# Altium PCB 0.PCB1.PcbDoc (part 1 of 8)
Units mil, origin at the board's own origin, x right, y up, seen from the top; angles counter-clockwise.
Board outline 3897.64 x 3897.64 mil, 6 copper layers (Top Layer, Layer 1, Layer 3, Layer 4, Layer 2, Bottom Layer), stack 60.567 mil thick; 715 components, 563 nets, 2530 pads, 1442 vias.
Unrouted connection lines stored in the file: 6.
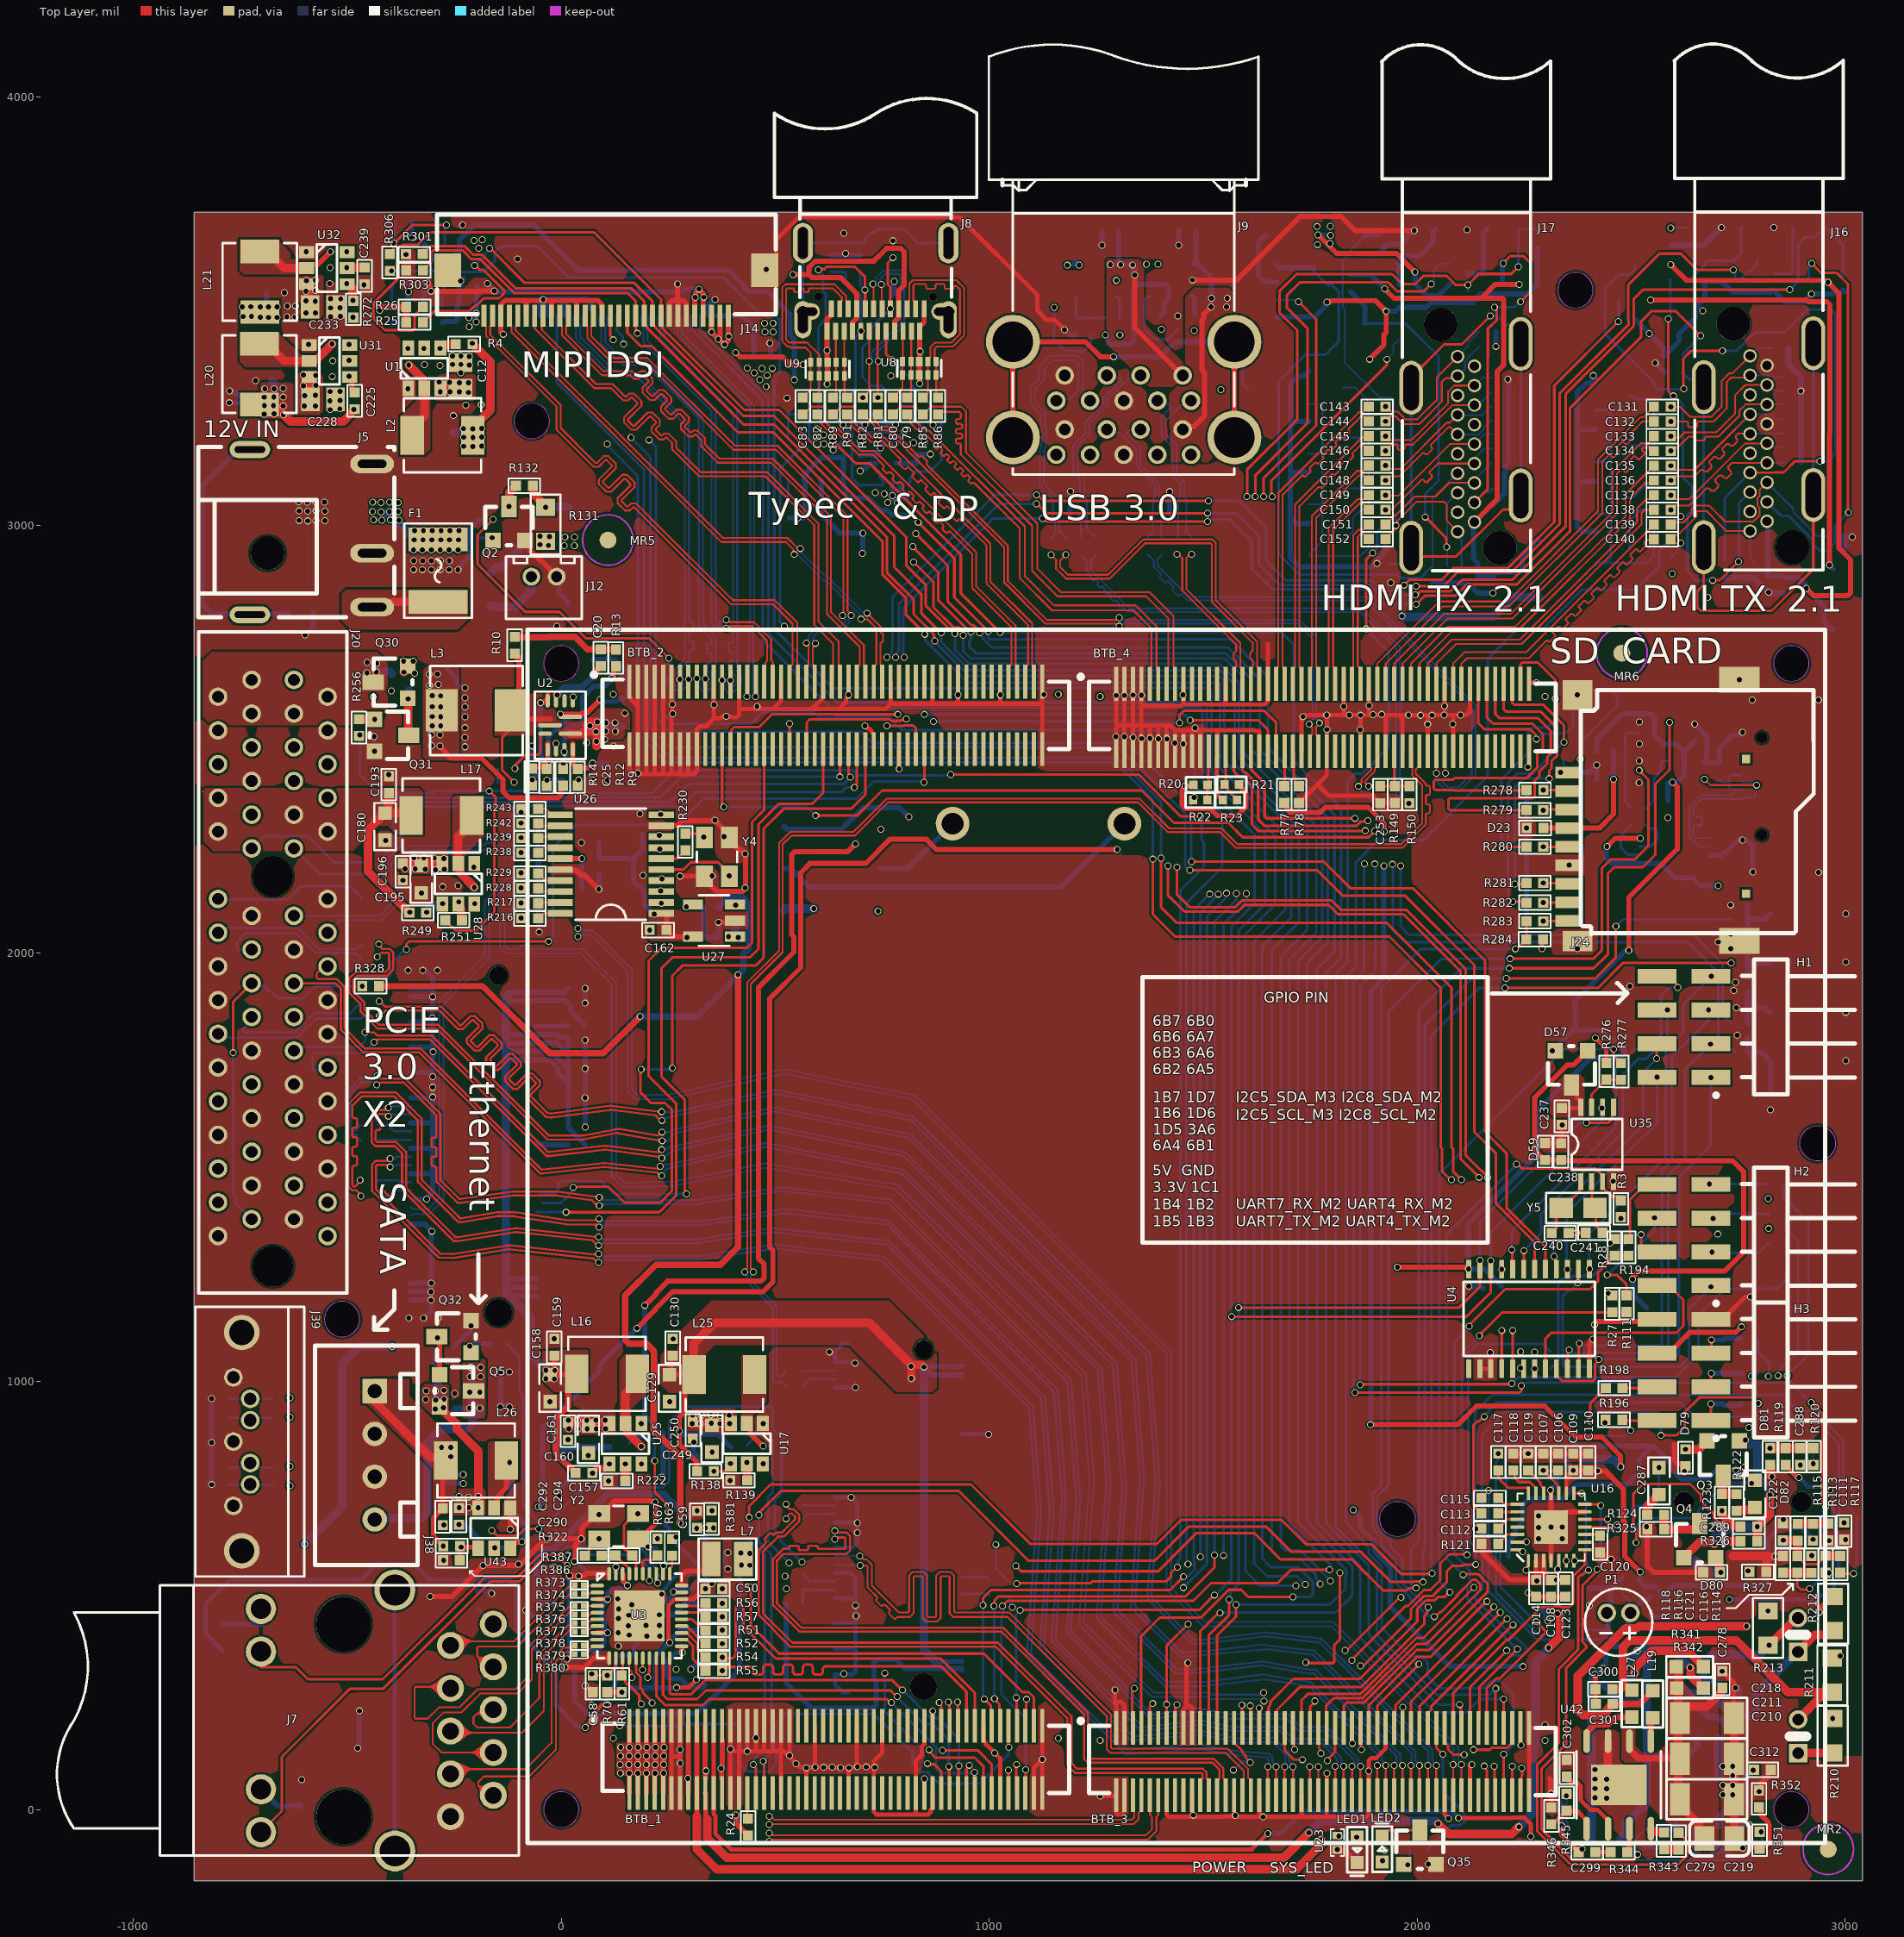
[diagram p0: Top Layer view]
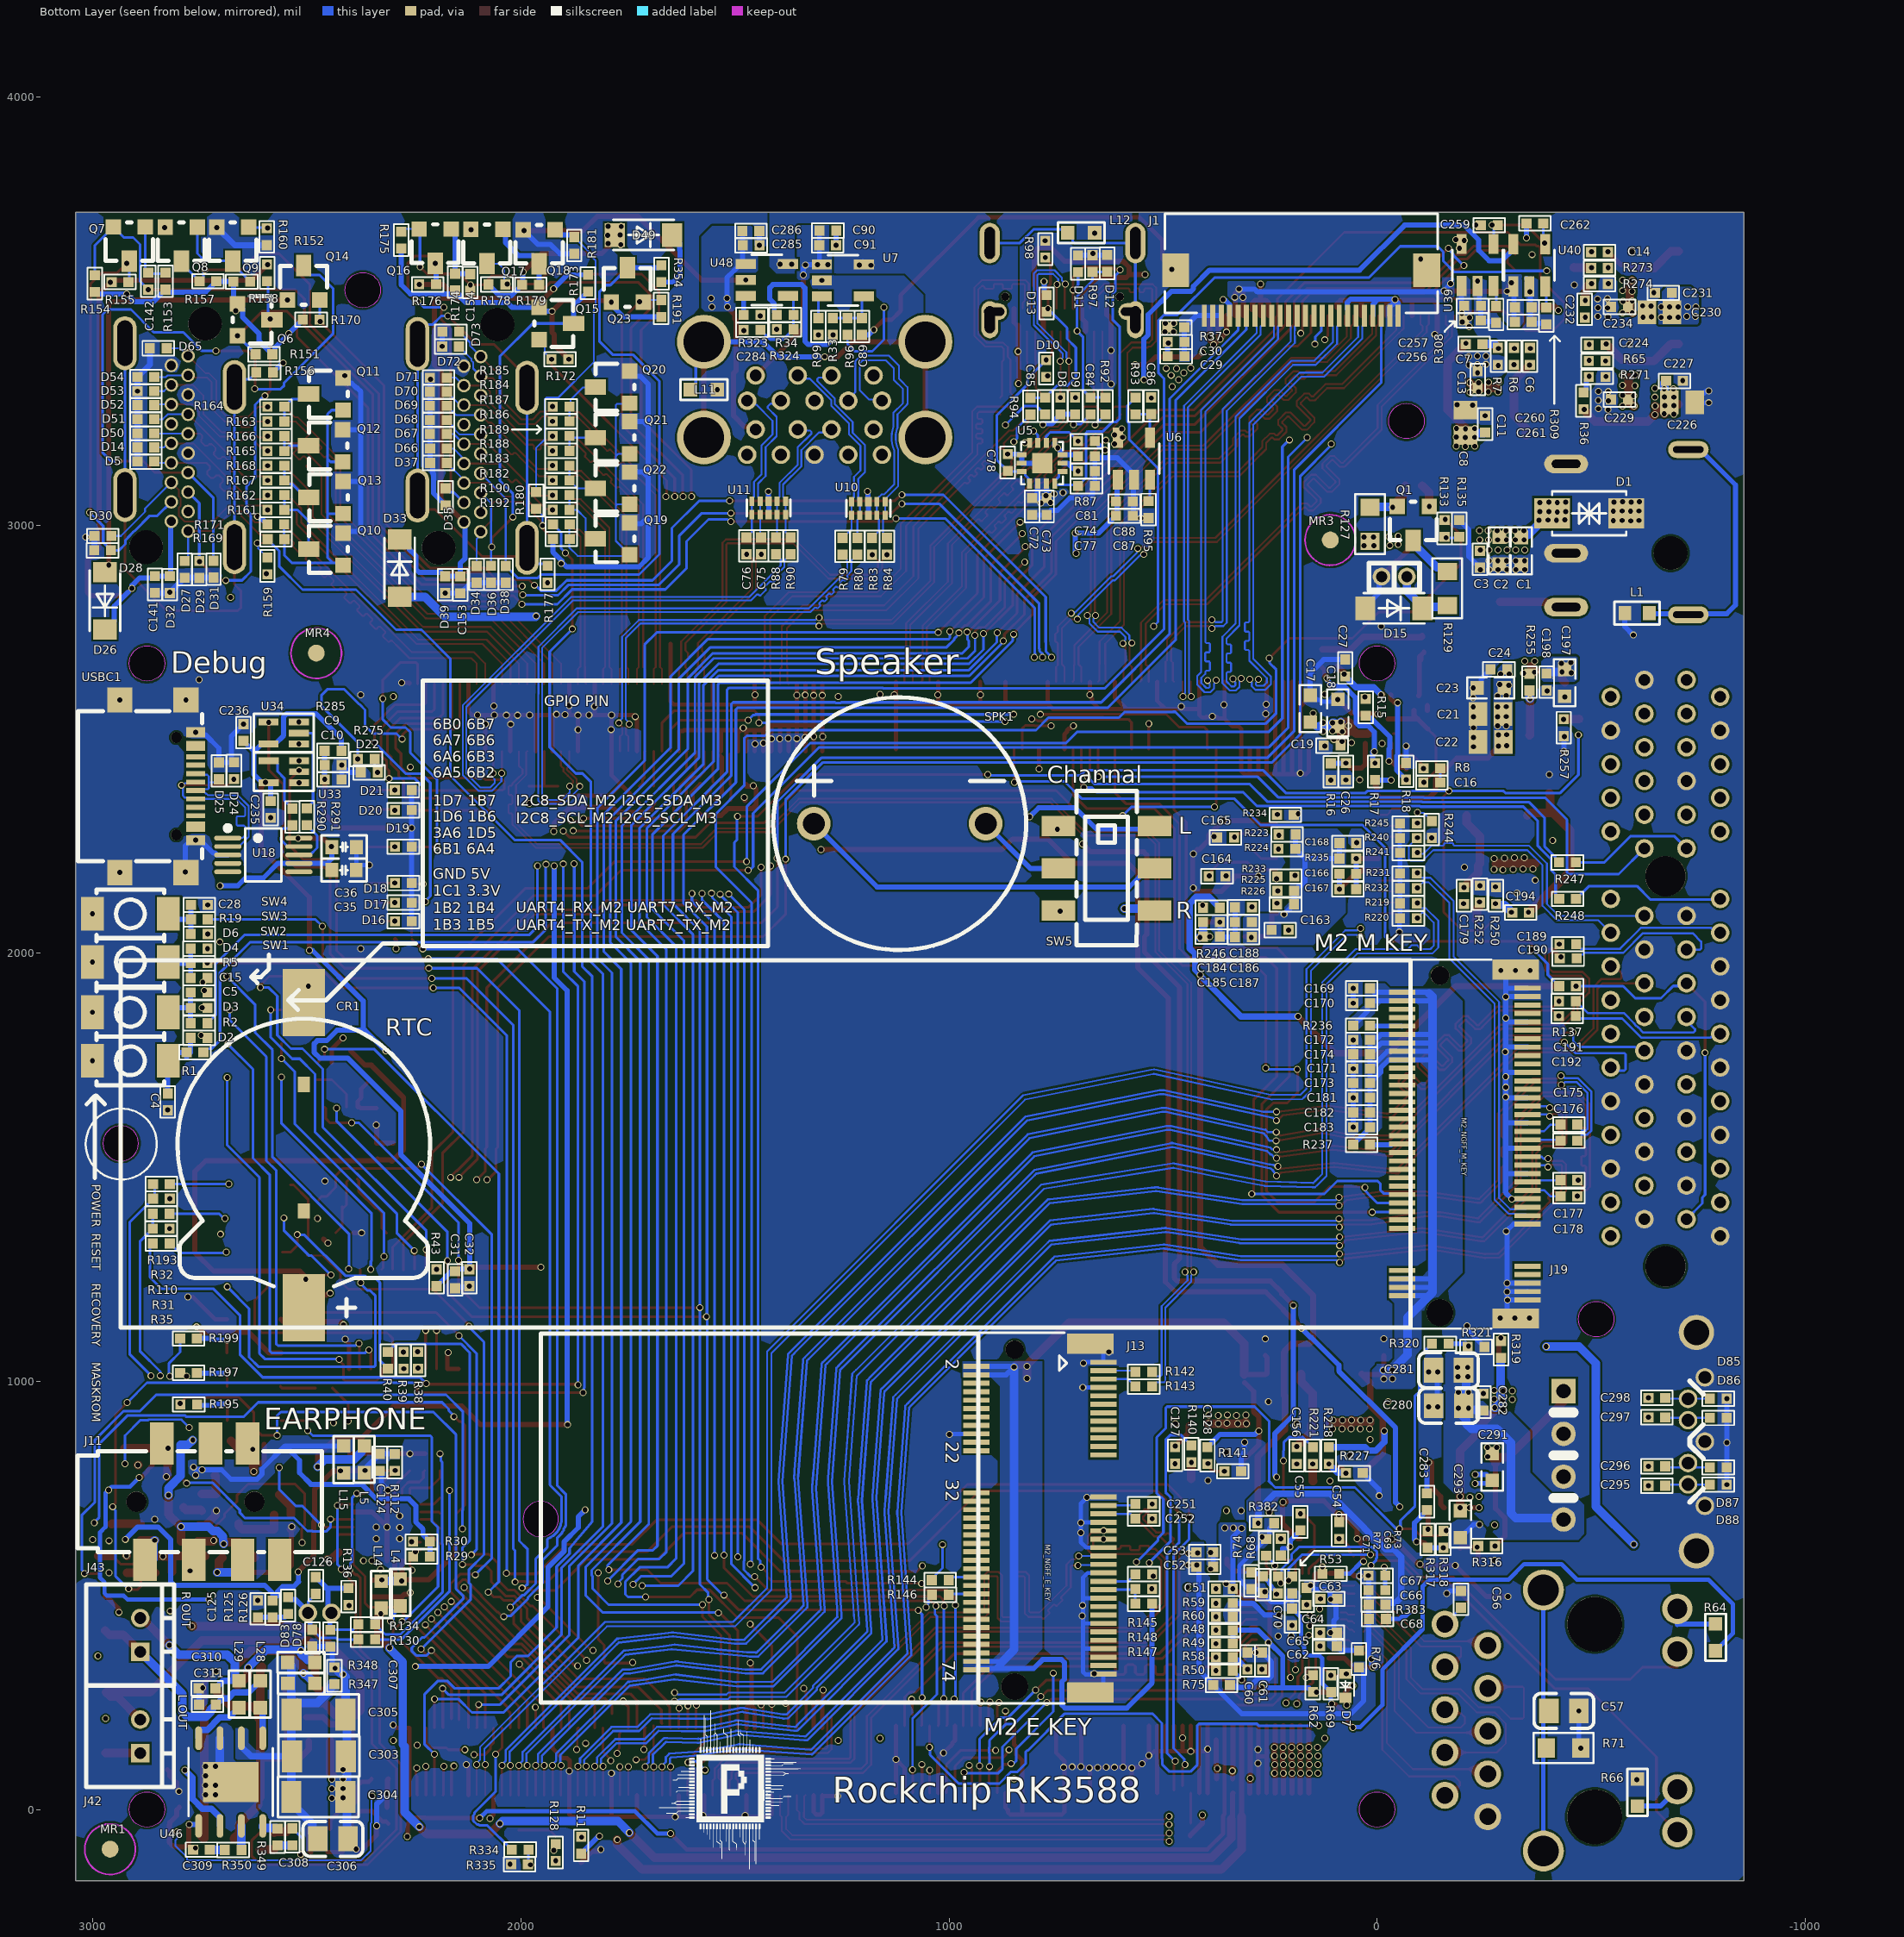
[diagram p1: Bottom Layer view, seen from below]
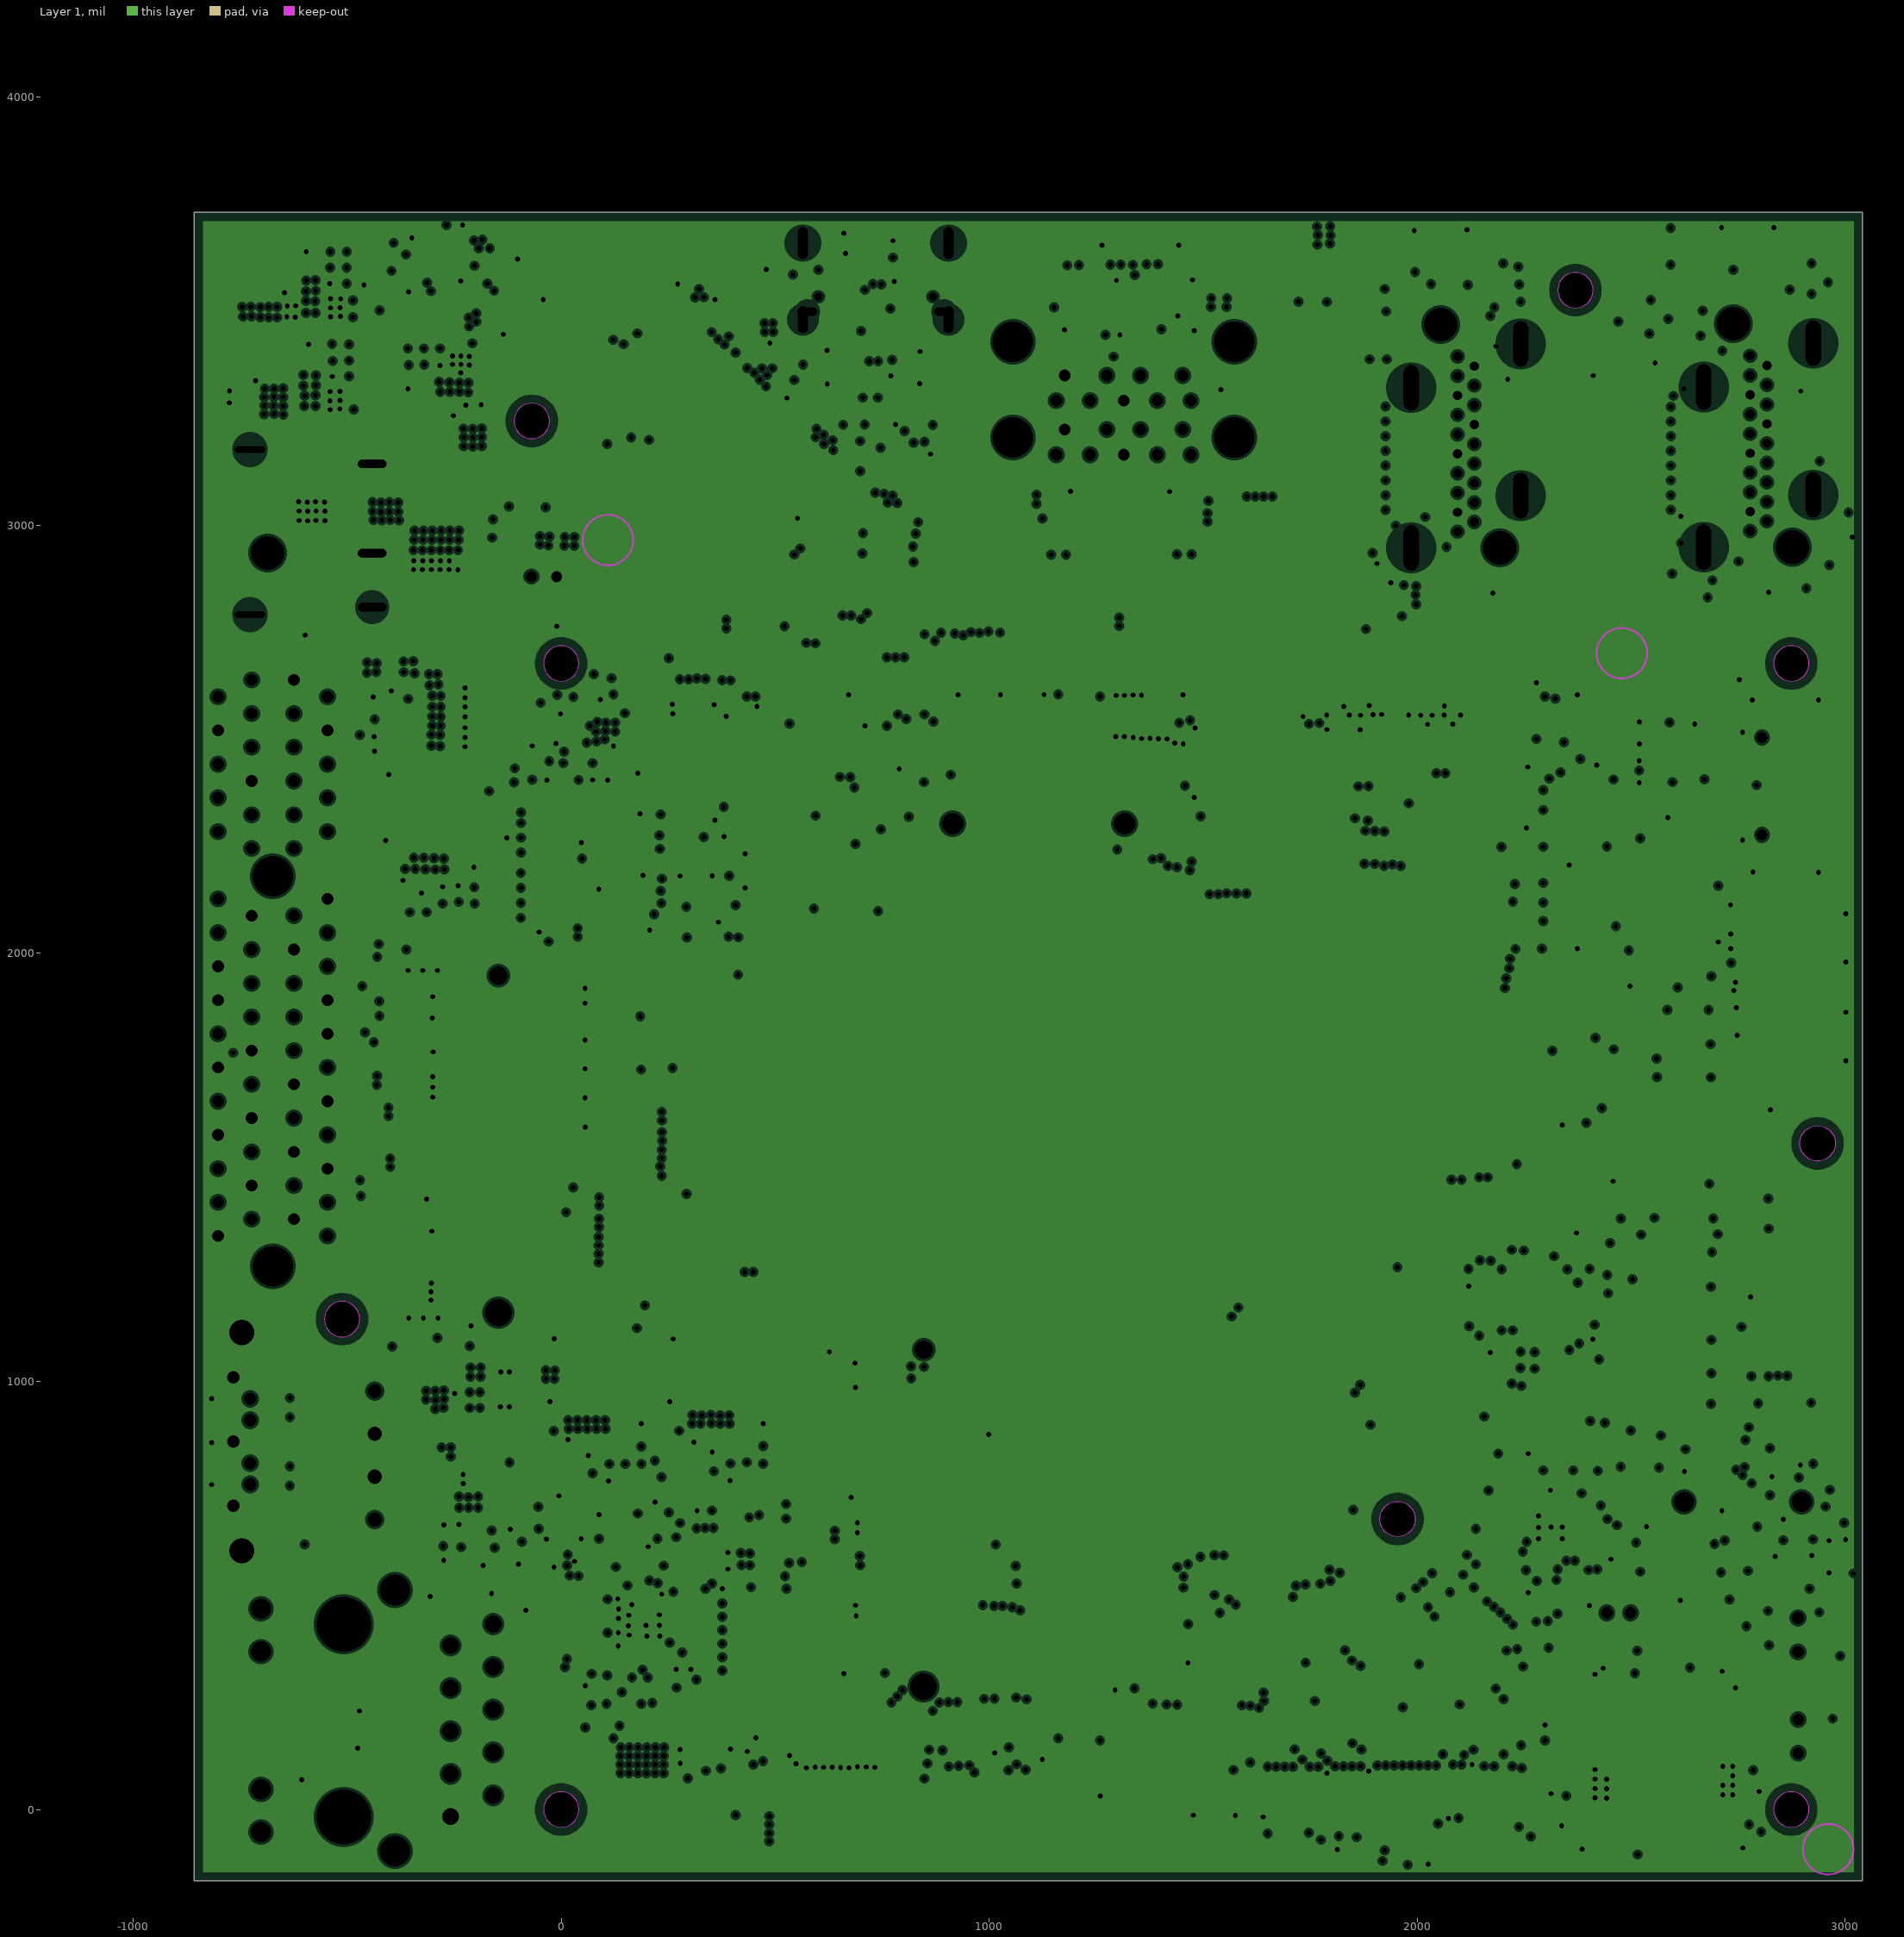
[diagram p2: Layer 1, clearances drawn from the general rule]
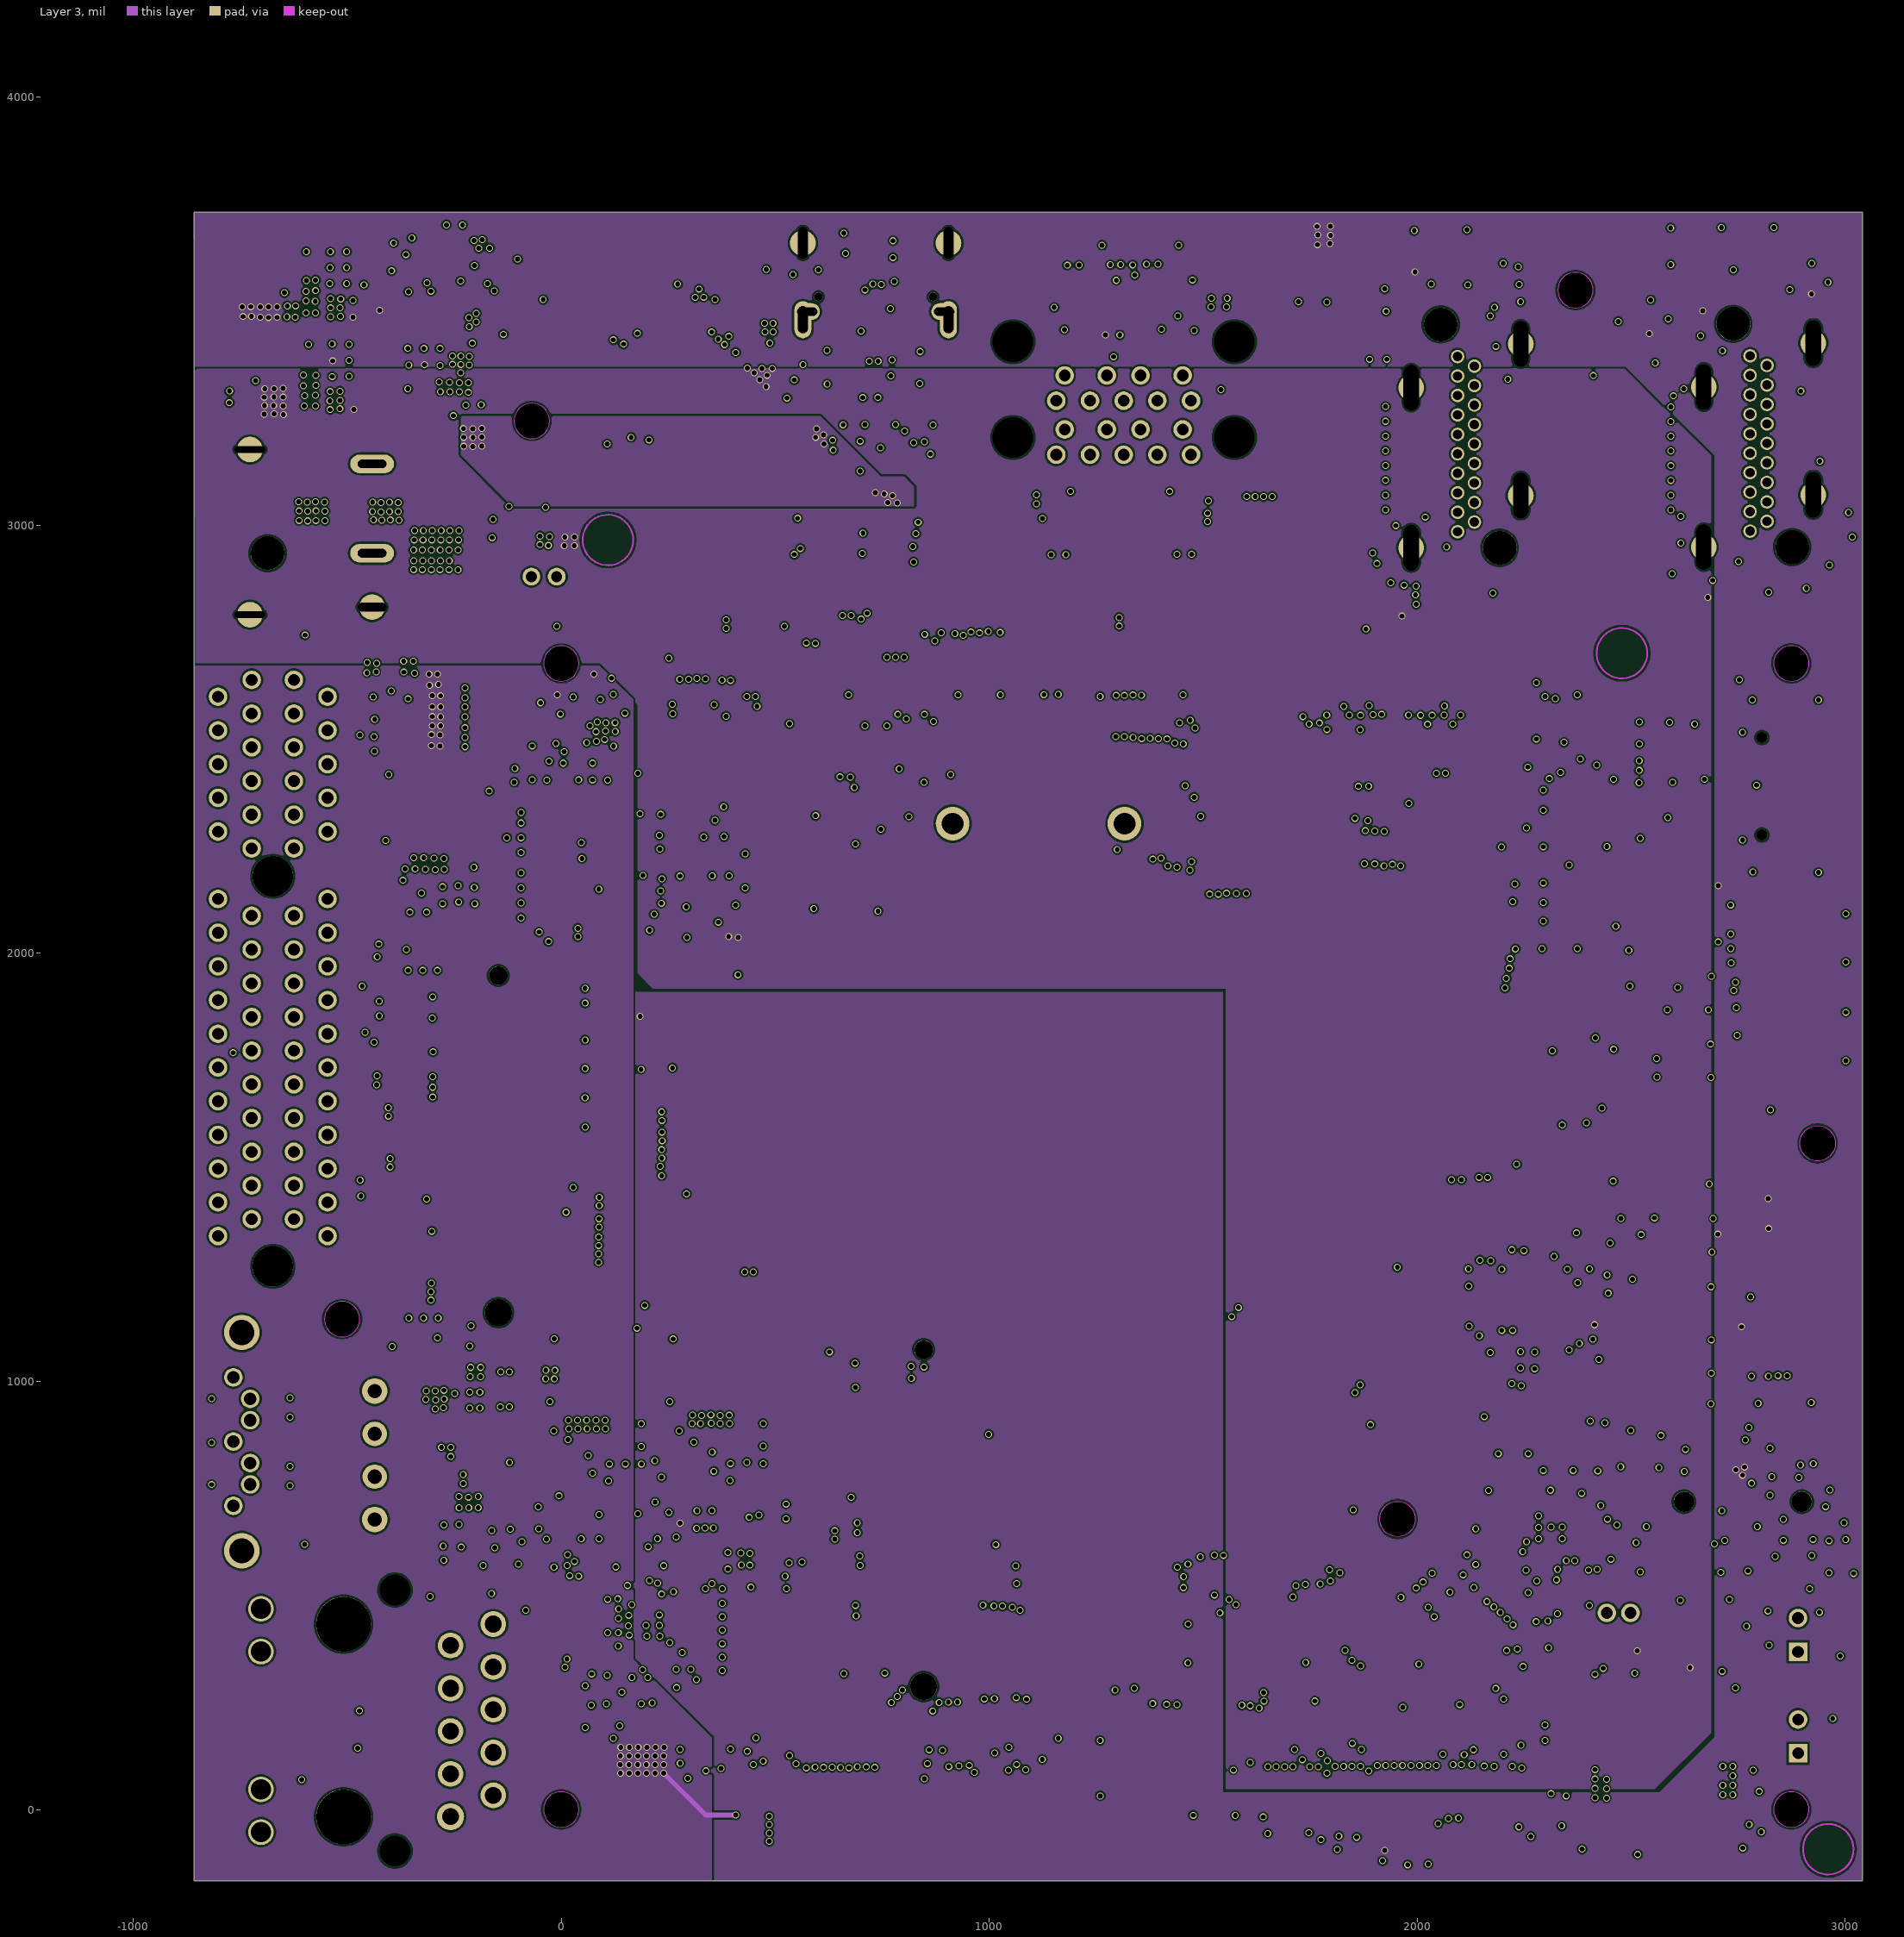
[diagram p3: Layer 3]
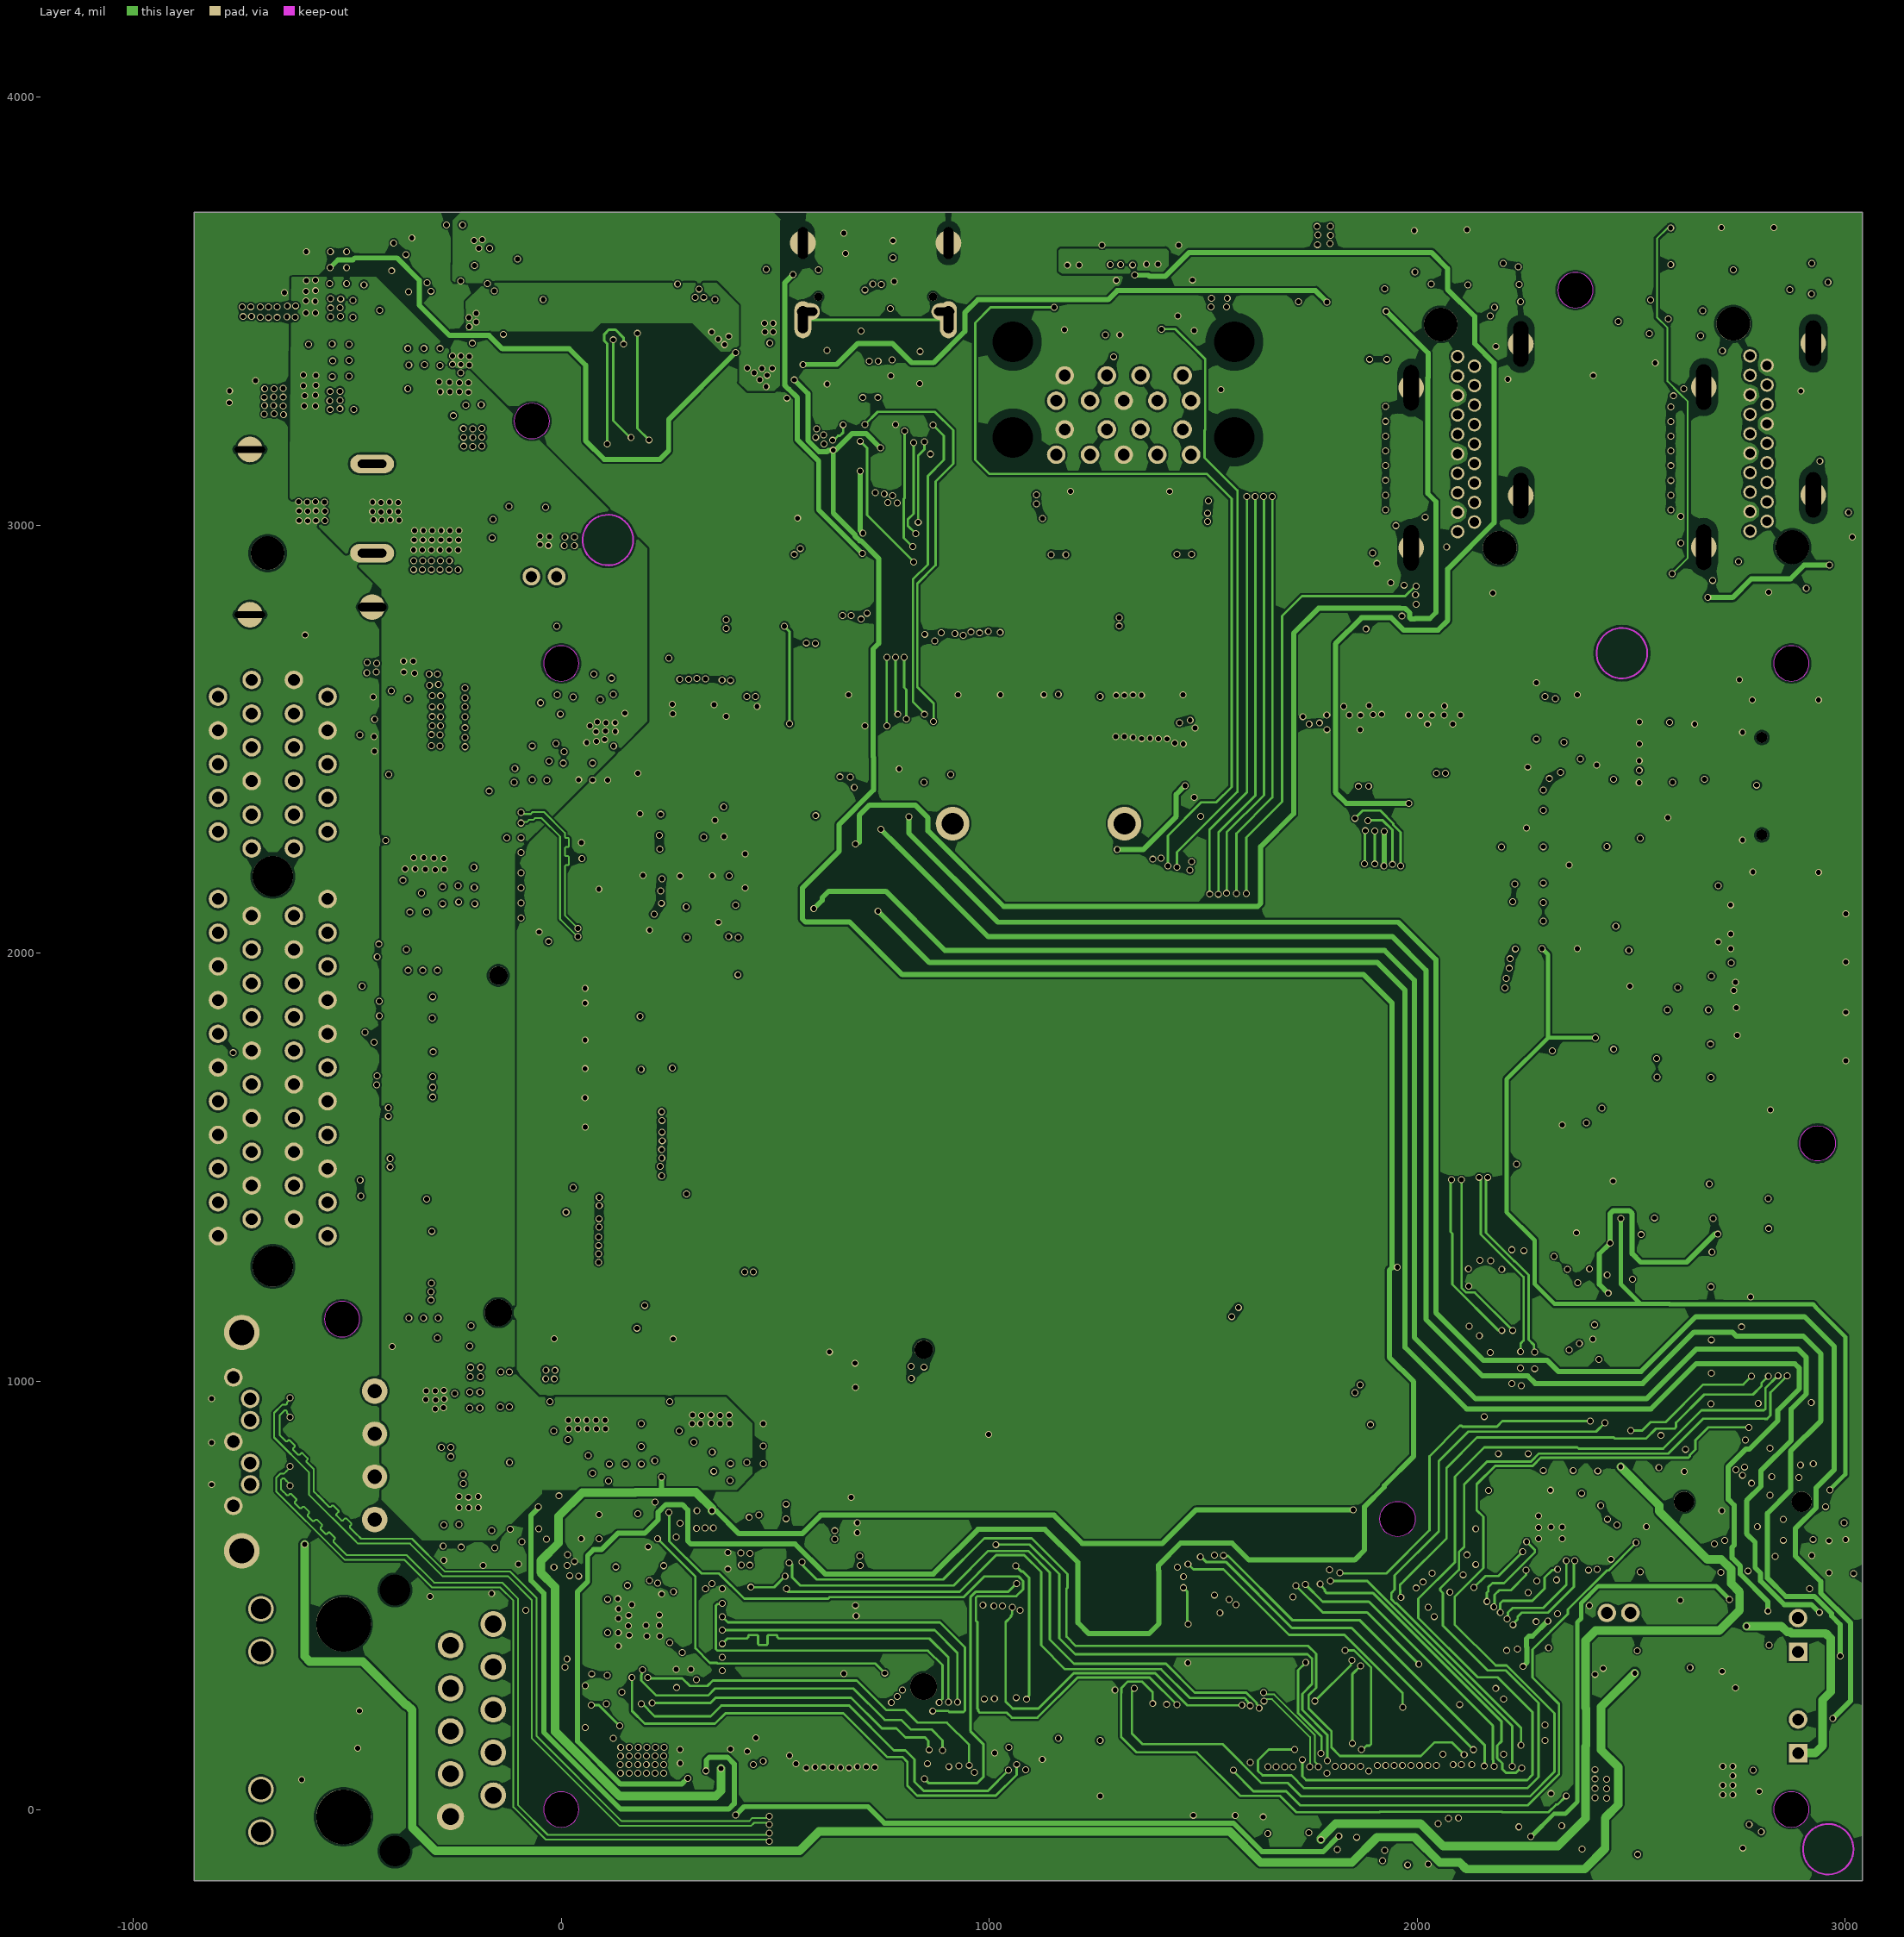
[diagram p4: Layer 4]
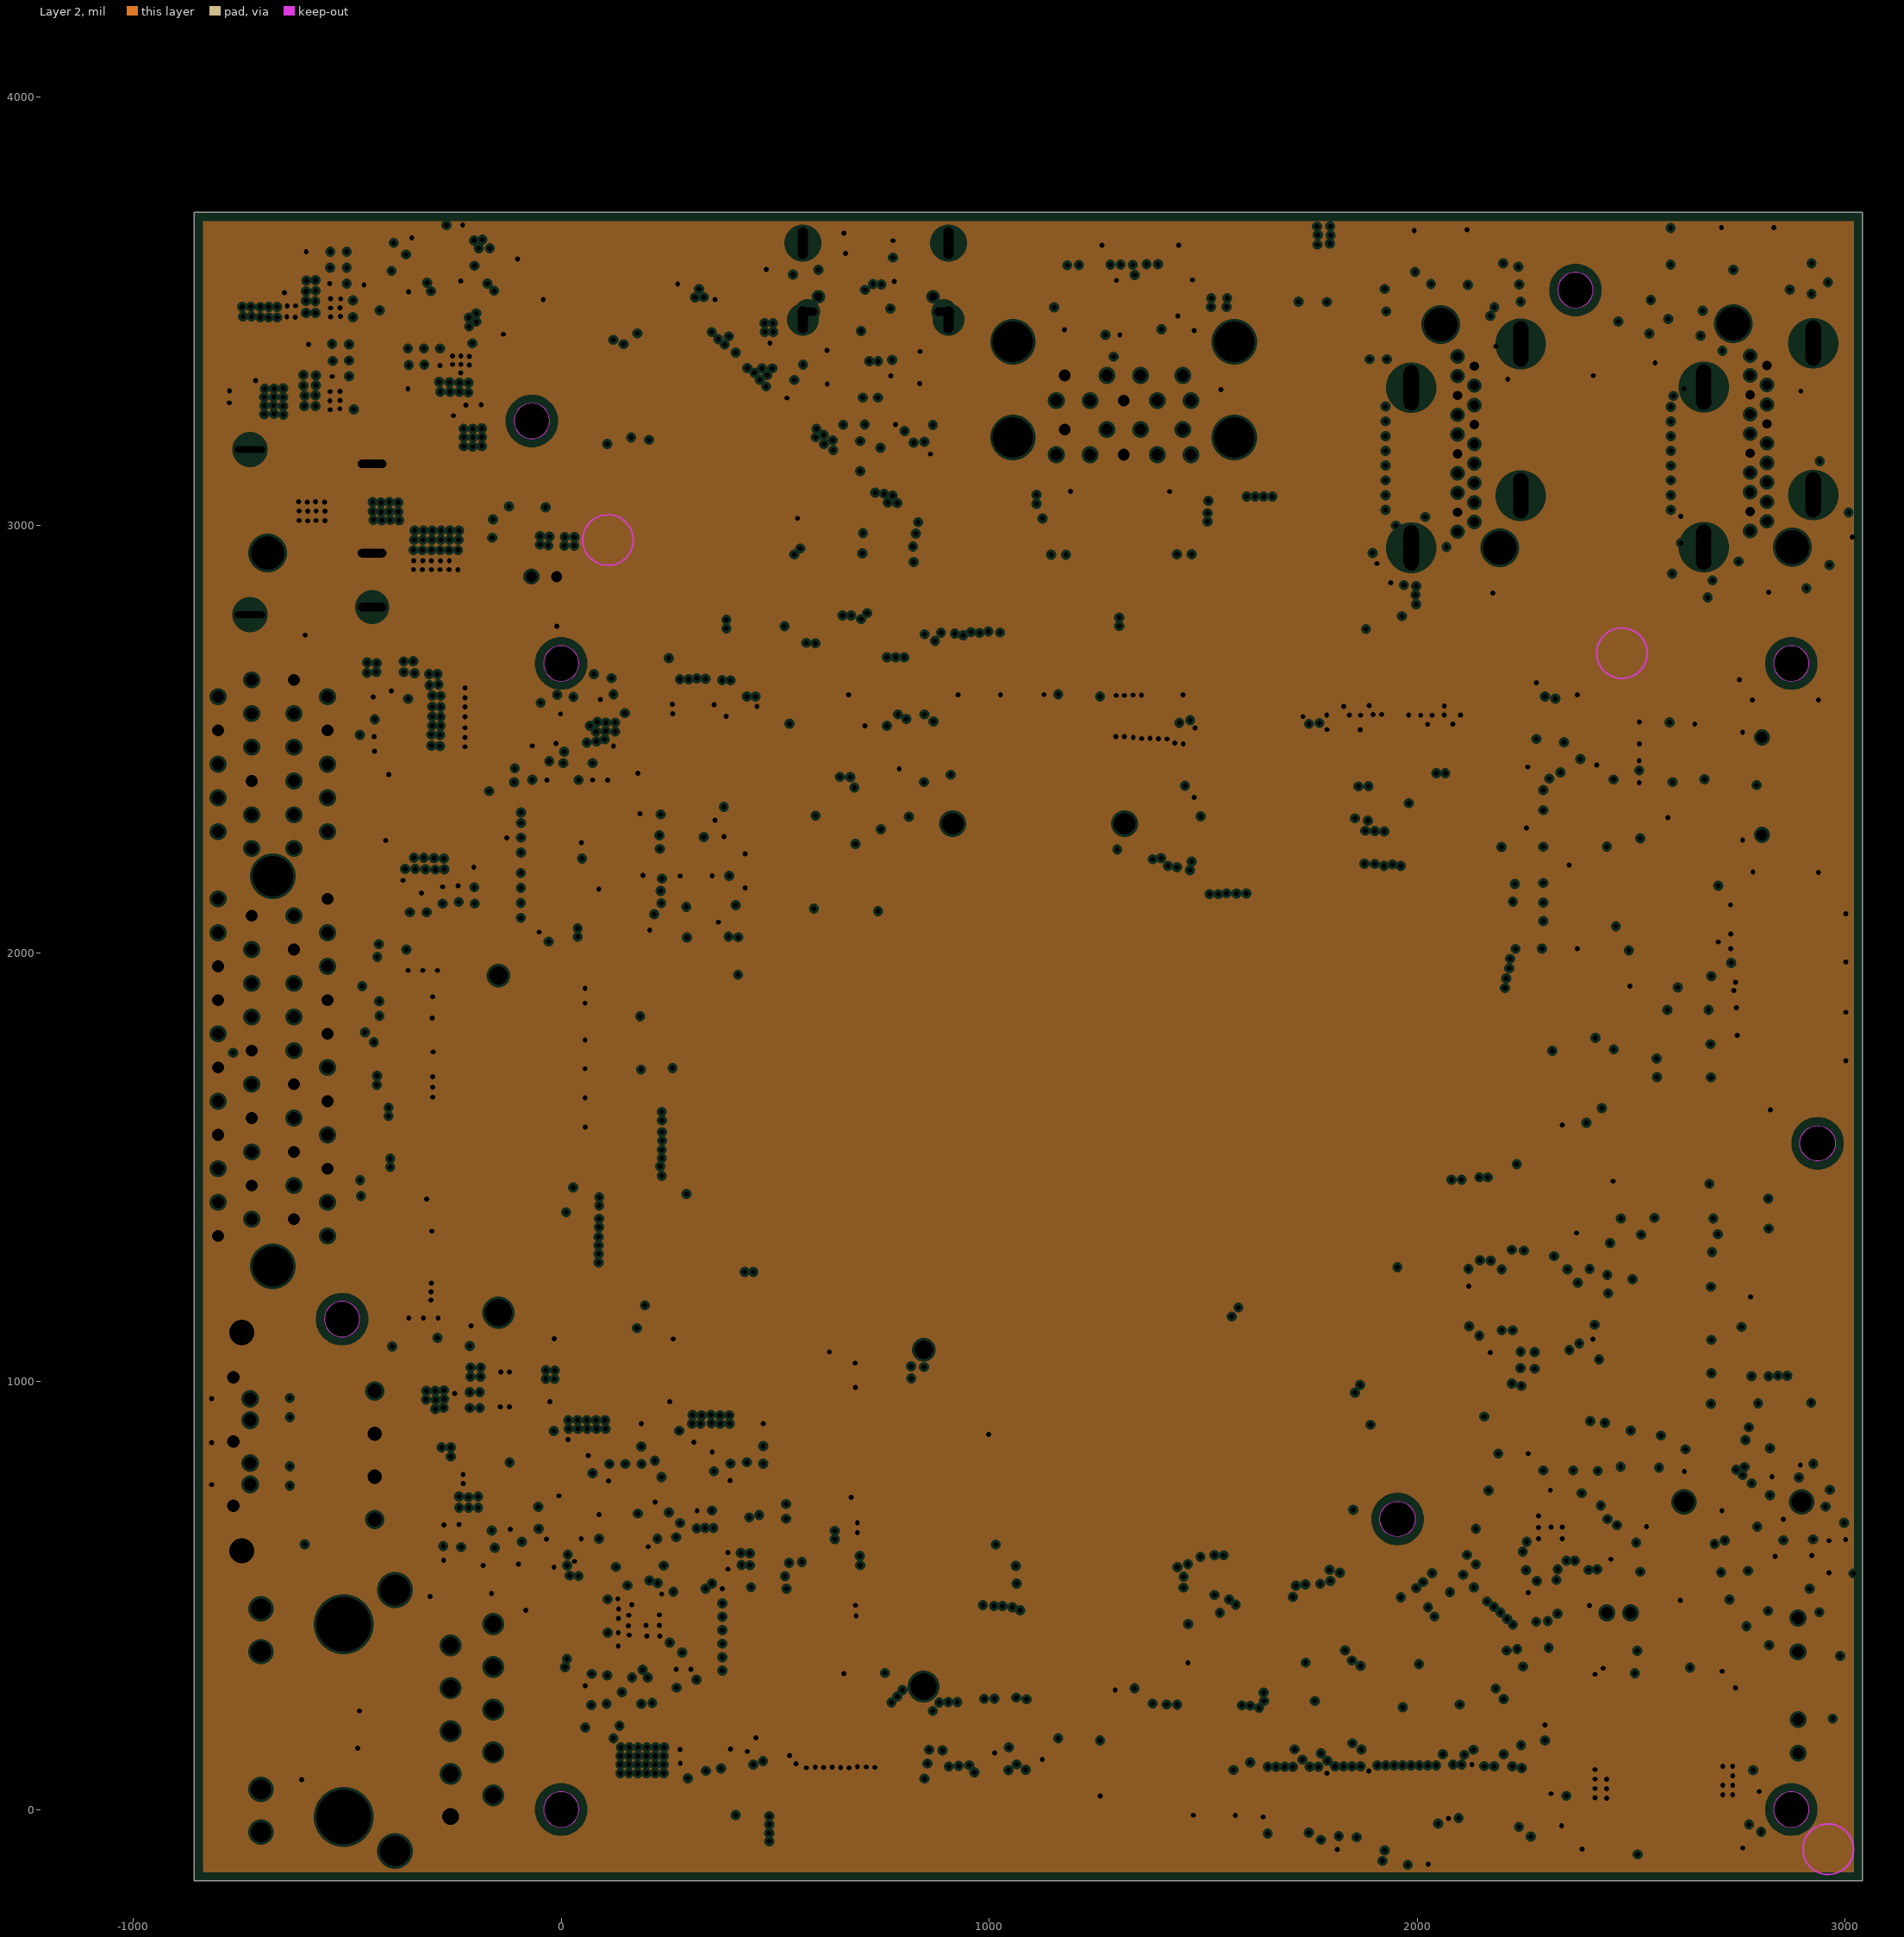
[diagram p5: Layer 2, clearances drawn from the general rule]

## Layer stack, top to bottom
Top Solder: solder mask 0.4, Solder Resist, Dk 3.5
Top Layer: signal copper 1.378
Dielectric 2: prepreg 3.9134, PP-006, Dk 4.1
Layer 1: plane copper 0.5984, net GND
Dielectric 4: core 21.6535, PP-006, Dk 4.41
Layer 3: signal copper 0.5984
Dielectric 1: prepreg 4.2835, FR-4, Dk 4.1
Layer 4: signal copper 0.5984
Dielectric 5: core 21.6535, PP-006, Dk 4.41
Layer 2: plane copper 0.5984, net GND
Dielectric 3: prepreg 3.9134, PP-006, Dk 4.1
Bottom Layer: signal copper 1.378
Bottom Solder: solder mask 0.4, Solder Resist, Dk 3.5

## Board outline
-857.04,-166.7 -857.04,3730.94 3040.6,3730.94 3040.6,-166.7
cut-out: 2832.68,0 ccw(c2874.02,0) 2874.02,-41.34 ccw(c2874.02,0) 2915.35,0 ccw(c2874.02,0) 2874.02,41.34 ccw(c2874.02,0)
cut-out: -41.34,0 ccw(c0,0) 0,-41.34 ccw(c0,0) 41.34,0 ccw(c0,0) 0,41.34 ccw(c0,0)
cut-out: 2328.28,3549.3 ccw(c2369.62,3549.3) 2369.62,3507.96 ccw(c2369.62,3549.3) 2410.95,3549.3 ccw(c2369.62,3549.3) 2369.62,3590.64 ccw(c2369.62,3549.3)
cut-out: -109.89,3243.59 ccw(c-68.55,3243.59) -68.55,3202.26 ccw(c-68.55,3243.59) -27.21,3243.59 ccw(c-68.55,3243.59) -68.55,3284.93 ccw(c-68.55,3243.59)
cut-out: -553.22,1145.5 ccw(c-511.88,1145.5) -511.88,1104.16 ccw(c-511.88,1145.5) -470.55,1145.5 ccw(c-511.88,1145.5) -511.88,1186.84 ccw(c-511.88,1145.5)
cut-out: 2832.68,2677.17 ccw(c2874.02,2677.17) 2874.02,2635.83 ccw(c2874.02,2677.17) 2915.35,2677.17 ccw(c2874.02,2677.17) 2874.02,2718.5 ccw(c2874.02,2677.17)
cut-out: -41.34,2677.17 ccw(c0,2677.17) 0,2635.83 ccw(c0,2677.17) 41.34,2677.17 ccw(c0,2677.17) 0,2718.5 ccw(c0,2677.17)
cut-out: 2935.37,1514.81 cw(c2935.37,1556.15) 2894.03,1556.15 cw(c2935.37,1556.15) 2935.37,1597.49 cw(c2935.37,1556.15) 2976.71,1556.15 cw(c2935.37,1556.15)
cut-out: 1954.16,637.12 cw(c1954.16,678.45) 1912.82,678.45 cw(c1954.16,678.45) 1954.16,719.79 cw(c1954.16,678.45) 1995.5,678.45 cw(c1954.16,678.45)

## Design rules (kind name [scope] priority, off if disabled: settings)
Clearance via_poly [IsVia vs InPoly] p1: gap=4 ignorepadtopadclearanceinfootprint=FALSE
Clearance poly [InPoly] p2: gap=5 ignorepadtopadclearanceinfootprint=FALSE
Clearance via [IsVia vs IsVia] p3: gap=3.54 ignorepadtopadclearanceinfootprint=FALSE
Clearance Clearance_all [All] p4: gap=4 ignorepadtopadclearanceinfootprint=FALSE
DiffPairsRouting "90 ohm" [InDifferentialPairClass('19b.TYPEC0_USB20') or InDifferentialPairClass('20b.TYPEC1_USB20') or InDifferentialPairClass('21.USB20_HOST0') or InDifferentialPairClass('22.USB20_HOST1') or InDifferentialPairClass('37.uart_usb')] p1: maxlimit=6 minlimit=4 mostfreqgap=4 toplayer_minwidth=4.4 toplayer_maxwidth=4.4 toplayer_prefwidth=4.4 midlayer1_minwidth=4.13 midlayer1_maxwidth=4.13 midlayer1_prefwidth=4.13 midlayer2_minwidth=4.13 midlayer2_maxwidth=4.13 midlayer2_prefwidth=4.13 bottomlayer_minwidth=4.4 bottomlayer_maxwidth=4.4 bottomlayer_prefwidth=4.4 maxuncoupledlength=500
DiffPairsRouting "100 ohm" [InDifferentialPairClass('16.HDMI_TX0') or InDifferentialPairClass('17.HDMI_TX1') or InDifferentialPairClass('28a.PCIE20_0') or InDifferentialPairClass('29b.PCIE20_1_REFCLK') or InDifferentialPairClass('31b.PCIE30_PORT0_REF_CLK') or InDifferentialPairClass('32b.PCIE30_PORT1_REF_CLK') or InDifferentialPairClass('23b.RJ45')] p2: maxlimit=14 minlimit=6 mostfreqgap=7 toplayer_maxgap=11 toplayer_prefgap=6 toplayer_minwidth=4.29 toplayer_maxwidth=4.29 toplayer_prefwidth=4.29 midlayer1_mingap=7 midlayer1_minwidth=4.21 midlayer1_maxwidth=4.21 midlayer1_prefwidth=4.21 midlayer2_mingap=7 midlayer2_minwidth=4.21 midlayer2_maxwidth=4.21 midlayer2_prefwidth=4.21 bottomlayer_maxgap=11 bottomlayer_prefgap=6 bottomlayer_minwidth=4.29 bottomlayer_maxwidth=4.29 bottomlayer_prefwidth=4.29 maxuncoupledlength=500
DiffPairsRouting 95ohm [InDifferentialPairClass('10.MIPI_DPHY0_TX') or InDifferentialPairClass('12.MIPI_DPHY0_RX') or InDifferentialPairClass('19a.TYPEC0') or InDifferentialPairClass('20a.TYPEC1')] p3: maxlimit=8 minlimit=5 mostfreqgap=5 toplayer_minwidth=4.42 toplayer_maxwidth=4.42 toplayer_prefwidth=4.42 midlayer1_minwidth=4.08 midlayer1_maxwidth=4.08 midlayer1_prefwidth=4.08 midlayer2_minwidth=4.08 midlayer2_maxwidth=4.08 midlayer2_prefwidth=4.08 bottomlayer_minwidth=4.42 bottomlayer_maxwidth=4.42 bottomlayer_prefwidth=4.42 maxuncoupledlength=500
DiffPairsRouting 85ohm [InDifferentialPairClass('29a.PCIE20_1') or InDifferentialPairClass('31a.PCIE30_PORT0') or InDifferentialPairClass('32a.PCIE30_PORT1')] p4: maxlimit=6 minlimit=4 mostfreqgap=4 toplayer_minwidth=5.15 toplayer_maxwidth=5.15 toplayer_prefwidth=5.15 midlayer1_minwidth=4.8 midlayer1_maxwidth=4.8 midlayer1_prefwidth=4.8 midlayer2_minwidth=4.8 midlayer2_maxwidth=4.8 midlayer2_prefwidth=4.8 bottomlayer_minwidth=5.15 bottomlayer_maxwidth=5.15 bottomlayer_prefwidth=5.15 maxuncoupledlength=500
MatchedLengths ddr_diff [InDifferentialPairClass('01.DDR_CH0') or InDifferentialPairClass('04.DDR_CH1')] p1: tolerance=1000 checknetsindiffpair=TRUE checkdiffpairvsdiffpair=FALSE checkxsignals=FALSE checkothers=FALSE usedelayunits=TRUE delaytolerance=1.000000
MatchedLengths ddr_addr_data [InxSignalClass('01a.ddr1_low_data_a') or InxSignalClass('01b.ddr1_low_data_b') or InxSignalClass('02a.ddr1_high_data_a') or InxSignalClass('02b.ddr1_high_data_b') or InxSignalClass('03a.ddr1_command_a') or InxSignalClass('03b.ddr1_command_b')or InxSignalClass('04a.ddr2_low_data_c') or InxSignalClass('04b.ddr2_low_data_d') or InxSignalClass('05a.ddr2_high_data_c') or InxSignalClass('05b.ddr2_high_data_d') or InxSignalClass('06a.ddr2_command_c') or InxSignalClass('06b.ddr2_command_d')] p2: tolerance=1000 checknetsindiffpair=FALSE checkdiffpairvsdiffpair=TRUE checkxsignals=TRUE checkothers=TRUE usedelayunits=TRUE delaytolerance=16.000000
MatchedLengths ddr_dqs_clk [InxSignalClass('03c.ddr1_dqs_clk_a') or InxSignalClass('03d.ddr1_dqs_clk_b') or InxSignalClass('06c.ddr2_dqs_clk_c') or InxSignalClass('06d.ddr2_dqs_clk_d')] p3: tolerance=1000 checknetsindiffpair=FALSE checkdiffpairvsdiffpair=TRUE checkxsignals=TRUE checkothers=TRUE usedelayunits=TRUE delaytolerance=40.000000
PlaneClearance [All] p1: clearance=6
PlaneConnect [All] p1: pad.planeconnectstyle=Relief pad.reliefexpansion=20 pad.reliefentries=4 pad.reliefconductorwidth=10 pad.reliefairgap=10 via.planeconnectstyle=Direct via.reliefexpansion=20 via.reliefentries=4 via.reliefconductorwidth=10 via.reliefairgap=10
PolygonConnect [All] p1: connectstyle=Direct reliefconductorwidth=10 reliefentries=4 polygonreliefangle="90 Angle" airgapwidth=10
RoutingVias [All] p1: holewidth=11.81 width=16.14 viastyle="Through Hole" minholewidth=11.81 minwidth=16.14 maxholewidth=35.43 maxwidth=39.37
SolderMaskExpansion [All] p1: expansion=4 istentingtop=FALSE
Width power [InNetClass('33.POWER')] p1: maxlimit=20 minlimit=10 preferedwidth=12 minimp=50.000000 maximp=50.000000 favimp=50.000000
Width other_50ohm [InNetClass('09.SDMMC') or InNetClass('23a.GMAC0')] p2: maxlimit=6.16 minlimit=5.61 preferedwidth=6.16 toplayer_minwidth=6.16 midlayer1_maxwidth=5.61 midlayer1_prefwidth=5.61 midlayer2_maxwidth=5.61 midlayer2_prefwidth=5.61 bottomlayer_minwidth=6.16 minimp=50.000000 maximp=50.000000 favimp=50.000000
Width other [All] p3: maxlimit=20 minlimit=4 preferedwidth=6.16 midlayer1_prefwidth=5.61 midlayer2_prefwidth=5.61 minimp=50.000000 maximp=50.000000 favimp=50.000000
27 further rules are at their usual default settings.

## Classes and differential pairs
differential pair class 37.uart_usb: "37 01.uart_usb"
net class 37.uart_usb: UART2_D+ UART2_D-
differential pair class 23b.RJ45: "23b 01.MDI0_PHY1" "23b 02.MDI1_PHY1" "23b 03.MDI2_PHY1" "23b 04.MDI3_PHY1" "23b 05.MDI0_PHY1_RJ45" "23b 06.MDI1_PHY1_RJ45" "23b 07.MDI2_PHY1_RJ45" "23b 08.MDI3_PHY1_RJ45"
net class 23b.RJ45: MDIN0_PHY1 MDIN0_PHY1_RJ45 MDIN1_PHY1 MDIN1_PHY1_RJ45 MDIN2_PHY1 MDIN2_PHY1_RJ45 MDIN3_PHY1 MDIN3_PHY1_RJ45 MDIP0_PHY1 MDIP0_PHY1_RJ45 MDIP1_PHY1 MDIP1_PHY1_RJ45 MDIP2_PHY1 MDIP2_PHY1_RJ45 MDIP3_PHY1 MDIP3_PHY1_RJ45
component class "Room Definition 2": C143 C144 C145 C146 C147 C148 C149 C150 C151 C152 C153 C154 D33 D34 D35 D36 D37 D38 D39 D49 D66 D67 D68 D69 D70 D71 D72 D73 J17 Q15 Q16 Q17 Q18 Q19 Q20 Q21 Q22 Q23 R172 R173 R174 R175 R176 R177 R178 R179 R180 R181 R182 R183 R184 R185 R186 R187 R188 R189 R190 R191 R192 R354
component class "Room Definition 1": C131 C132 C133 C134 C135 C136 C137 C138 C139 C140 C141 C142 D5 D14 D26 D27 D28 D29 D30 D31 D32 D50 D51 D52 D53 D54 D65 Q6 Q7 Q8 Q9 Q10 Q11 Q12 Q13 Q14 R151 R152 R153 R154 R155 R156 R157 R158 R159 R160 R161 R162 R163 R164 R165 R166 R167 R168 R169 R170 R171
differential pair class 32b.PCIE30_PORT1_REF_CLK: "32b 01.PCIE30_PORT1_REF_CLK" "32b 02.PCIE30_PORT1_REF_CLK_R" "32b 03.PCIEx4_REF_CLK" "32b 04.PCIEx4_REF_CLK_R"
differential pair class 32a.PCIE30_PORT1: "32a 01.PCIE30_PORT1_TX0" "32a 02.PCIE30_PORT1_TX1" "32a 03.PCIE30_PORT1_RX0" "32a 04.PCIE30_PORT1_RX1" "32a 05.PCIE30_PORT1_TX0_R" "32a 06.PCIE30_PORT1_TX1_R"
differential pair class 31b.PCIE30_PORT0_REF_CLK: "31b 01.PCIE30_PORT0_REF_CLK" "31b 02.PCIE30_PORT0_REF_CLK_R" "31b 03.M2PCIE_REF_CLK" "31b 04.M2PCIE_REF_CLK_R"
differential pair class 31a.PCIE30_PORT0: "31a 01.PCIE30_PORT0_TX0" "31a 02.PCIE30_PORT0_TX1" "31a 03.PCIE30_PORT0_RX0" "31a 04.PCIE30_PORT0_RX1" "31a 05.PCIE30_PORT0_TX0_R" "31a 06.PCIE30_PORT0_TX1_R"
differential pair class 29b.PCIE20_1_REFCLK: "29b 01.PCIE20_1_REFCLK"
differential pair class 29a.PCIE20_1: "29a 01.PCIE20_1_TX" "29a 02.PCIE20_1_RX" "29a 03.PCIE20_1_TX_R"
differential pair class 28a.PCIE20_0: "28a 01.PCIE20_0_TX" "28a 02.PCIE20_0_RX" "28a 03.SATA30_0_TX_R" "28a 04.SATA30_0_RX_R"
differential pair class 22.USB20_HOST1: "22 01.USB20_HOST1" "22 02.USB20_HOST1_R"
differential pair class 21.USB20_HOST0: "21 01.USB20_HOST0" "21 02.USB20"
differential pair class 20b.TYPEC1_USB20: "20b 01.TYPEC1_USB20_OTG" "20b 02.USB30"
differential pair class 20a.TYPEC1: "20a 01.TYPEC1_SSTX1" "20a 02.TYPEC1_SSRX1" "20a 03.USB30_TX" "20a 04.USB30_RX"
differential pair class 19b.TYPEC0_USB20: "19b 01.TYPEC0_USB20_OTG" "19b 02.TYPEC"
differential pair class 19a.TYPEC0: "19a 01.TYPEC0_SSTX1" "19a 02.TYPEC0_SSTX2" "19a 03.TYPEC0_SSRX1" "19a 04.TYPEC0_SSRX2" "19a 05.TYPEC_SSTX1" "19a 06.TYPEC_SSTX2" "19a 07.TYPEC_SSRX1" "19a 08.TYPEC_SSRX2"
differential pair class 17.HDMI_TX1: "17 01.HDMI_TX1_D0" "17 02.HDMI_TX1_D1" "17 03.HDMI_TX1_D2" "17 04.HDMI_TX1_D3" "17 05.HDMI_TX1_SBD" "17 06.HDMI_TX1_D0_PORT" "17 07.HDMI_TX1_D1_PORT" "17 08.HDMI_TX1_D2_PORT" "17 09.HDMI_TX1_D3_PORT" "17 10.HDMI1_EARC"
differential pair class 16.HDMI_TX0: "16 01.HDMI_TX0_D0" "16 02.HDMI_TX0_D1" "16 03.HDMI_TX0_D2" "16 04.HDMI_TX0_D3" "16 05.HDMI_TX0_SBD" "16 06.HDMI_TX0_D0_PORT" "16 07.HDMI_TX0_D1_PORT" "16 08.HDMI_TX0_D2_PORT" "16 09.HDMI_TX0_D3_PORT" "16 10.HDMI0_EARC"
differential pair class 12.MIPI_DPHY0_RX: "12 01.MIPI_DPHY0_RX_CLK" "12 02.MIPI_DPHY0_RX_D0" "12 03.MIPI_DPHY0_RX_D1" "12 04.MIPI_DPHY0_RX_D2" "12 05.MIPI_DPHY0_RX_D3"
differential pair class 10.MIPI_DPHY0_TX: "10 01.MIPI_DPHY0_TX_CLK" "10 02.MIPI_DPHY0_TX_D0" "10 03.MIPI_DPHY0_TX_D1" "10 04.MIPI_DPHY0_TX_D2" "10 05.MIPI_DPHY0_TX_D3"
net class 34.GPIO: AUTO_PWRON_EN CTP0_INT EARPHONE_CTL EXT_PWR_EN FAN_CTRL FUSB302_INT GMAC0_MDC GMAC0_MDIO GMAC0_RSTn GPIO0_A0 GPIO0_B2 GPIO0_B7 GPIO0_C6 GPIO1_A2 GPIO1_A4 GPIO1_A7 GPIO1_B0 GPIO1_B1 GPIO1_C0 GPIO1_C1 GPIO1_C6 GPIO1_D3 GPIO1_D5 GPIO2_C5 GPIO3_A6 GPIO3_D5 GPIO4_A3 GPIO4_B1 GPIO4_C6 GPIO6_A4 GPIO6_A5 GPIO6_A6 GPIO6_A7 GPIO6_B0 GPIO6_B1 GPIO6_B2 GPIO6_B3 GPIO6_B6 GPIO6_B7 HDMI_TX0_CEC_M0 HDMI_TX0_CEC_PORT HDMI_TX0_HPD_M0 HDMI_TX0_SCL_M0 HDMI_TX0_SCL_PORT HDMI_TX0_SDA_M0 HDMI_TX0_SDA_PORT HDMI_TX1_CEC_M0 HDMI_TX1_CEC_PORT HDMI_TX1_HPD_M0 HDMI_TX1_SCL_M0 HDMI_TX1_SCL_PORT HDMI_TX1_SDA_M0 HDMI_TX1_SDA_PORT HP_BUTTON_DET I2C0_SCL_M2 I2C0_SDA_M2 I2C1_SCL_M2 I2C1_SDA_M2 I2C2_SCL_M4 I2C2_SDA_M4 I2C5_SCL_M3 I2C5_SDA_M3 I2C7_SCL_M0 I2C7_SDA_M0 I2C8_SCL_M2 I2C8_SDA_M2 I2S0_LRCK I2S0_MCLK I2S0_SCLK I2S0_SDI0 I2S0_SDO0 PCIE30X1_0_CLKREQN_M0 PCIE30X1_0_PERSTN_M0 PCIE30X1_0_WAKEN_M0 PCIE30X2_CLKREQN_M1 PCIE30X2_PERSTN_M1 PCIE30X2_WAKEN_M1 PCIE30X4_CLKREQN_M1 PCIE30X4_PERSTN_M1 PCIE30X4_WAKEN_M1 PWR_ON RECOVERY_KEY RESETn RTC_INT SARADC_IN0_BOOT SARADC_IN2 SARADC_IN3 SDMMC_DET SDMMC_DET_R TYPEC0_SBU1 TYPEC0_SBU2 TYPEC0_USB20_OTG_ID TYPEC0_USB20_VBUSDET TYPEC1_SBU1 TYPEC1_SBU2 TYPEC1_USB20_OTG_ID TYPEC1_USB20_VBUSDET UART2_RX UART2_RX_M0_DEBUG UART2_TX UART2_TX_M0_DEBUG UART4_RX_M2 UART4_TX_M2 UART7_RX_M2 UART7_TX_M2
net class 33.POWER: 1V05_AVDD_PHY1 1V05_DVDD_PHY1 1V05_PHY1 1V8_DVDD_PHY1 3V3_AVDD_PHY1 3V3_DVDD_PHY1 CORE_VCC_1V8_S0 CORE_VCC_1V8_S3 CORE_VCC_3V3_S0 CORE_VCC_3V3_S3 CORE_VCCA_1V8_S0 GND HDMI0_5V HDMI1_5V M2EKEY_3V3 M2PCIE_3V3 SATA_5V0 SATA_12V VBUS5V0_TYPEC VCC3V3_PCIECLK VCC3V3_PCIEx4 VCC3V3_SD_S3 VCC4V0_SYS VCC5V0_USB20_HOST VCC5V0_USB30_OTG VCC5V0_USB_S0 VCC12V_PCIEx4 VCC_3V3_S0 VCC_5V0_S0 VCC_12V VCC_RTC VCCA1V8_CODEC VCCA3V3_CODEC VDD_CAM0_5V VDD_LCD0_3V3 VDD_LCD0_5V
net class "32b.PCIE3.0 1 clock": PCIE30_PORT1_REF_CLKN PCIE30_PORT1_REF_CLKN_R PCIE30_PORT1_REF_CLKP PCIE30_PORT1_REF_CLKP_R PCIEx4_REF_CLKN PCIEx4_REF_CLKN_R PCIEx4_REF_CLKP PCIEx4_REF_CLKP_R
net class "32a.PCIE3.0 1": PCIE30_PORT1_RX0N PCIE30_PORT1_RX0P PCIE30_PORT1_RX1N PCIE30_PORT1_RX1P PCIE30_PORT1_TX0N PCIE30_PORT1_TX0N_R PCIE30_PORT1_TX0P PCIE30_PORT1_TX0P_R PCIE30_PORT1_TX1N PCIE30_PORT1_TX1N_R PCIE30_PORT1_TX1P PCIE30_PORT1_TX1P_R
net class "31b.PCIE3.0 0 clock": M2PCIE_REF_CLKN M2PCIE_REF_CLKN_R M2PCIE_REF_CLKP M2PCIE_REF_CLKP_R PCIE30_PORT0_REF_CLKN PCIE30_PORT0_REF_CLKN_R PCIE30_PORT0_REF_CLKP PCIE30_PORT0_REF_CLKP_R
net class "31a.PCIE3.0 0": PCIE30_PORT0_RX0N PCIE30_PORT0_RX0P PCIE30_PORT0_RX1N PCIE30_PORT0_RX1P PCIE30_PORT0_TX0N PCIE30_PORT0_TX0N_R PCIE30_PORT0_TX0P PCIE30_PORT0_TX0P_R PCIE30_PORT0_TX1N PCIE30_PORT0_TX1N_R PCIE30_PORT0_TX1P PCIE30_PORT0_TX1P_R
net class "29b.PCIE2.0 1 clock": PCIE20_1_REFCLKN PCIE20_1_REFCLKP
net class "29a.PCIE2.0 1": PCIE20_1_RXN PCIE20_1_RXP PCIE20_1_TXN PCIE20_1_TXN_R PCIE20_1_TXP PCIE20_1_TXP_R
net class "28b.PCIE2.0 0 clock": PCIE20_0_REFCLKN PCIE20_0_REFCLKP
net class "28a.PCIE2.0 0": PCIE20_0_RXN PCIE20_0_RXP PCIE20_0_TXN PCIE20_0_TXP SATA30_0_RXN_R SATA30_0_RXP_R SATA30_0_TXN_R SATA30_0_TXP_R
net class 27.sound: I2C7_SCL_M0 I2C7_SDA_M0 I2S0_LRCK I2S0_MCLK I2S0_SCLK I2S0_SDI0 I2S0_SDO0
net class 23a.GMAC0: GMAC0_MCLKINOUT GMAC0_MCLKINOUT_R GMAC0_RXCLK GMAC0_RXCLK_R GMAC0_RXD0 GMAC0_RXD0_R GMAC0_RXD1 GMAC0_RXD1_R GMAC0_RXD2 GMAC0_RXD2_R GMAC0_RXD3 GMAC0_RXD3_R GMAC0_RXDV_CRS GMAC0_RXDV_CRS_R GMAC0_TXCLK GMAC0_TXD0 GMAC0_TXD1 GMAC0_TXD2 GMAC0_TXD3 GMAC0_TXEN
net class 22.USB1: USB20_HOST1_DM USB20_HOST1_DP
net class 21.USB0: USB20_DM1 USB20_DP1 USB20_HOST0_DM USB20_HOST0_DP
net class 20b.typec1_usb2.0: TYPEC1_USB20_OTG_DM TYPEC1_USB20_OTG_DP USB30_DM USB30_DP
net class 20a.typec1_usb3.0: TYPEC1_SSRX1N TYPEC1_SSRX1P TYPEC1_SSTX1N TYPEC1_SSTX1P USB30_RXN USB30_RXP USB30_TXN USB30_TXP
net class 19b.typec0_usb2.0: TYPEC0_USB20_OTG_DM TYPEC0_USB20_OTG_DP TYPEC_DM TYPEC_DP
net class 19a.typec0_usb3.0: TYPEC0_SSRX1N TYPEC0_SSRX1P TYPEC0_SSRX2N TYPEC0_SSRX2P TYPEC0_SSTX1N TYPEC0_SSTX1P TYPEC0_SSTX2N TYPEC0_SSTX2P TYPEC_SSRXN1 TYPEC_SSRXN2 TYPEC_SSRXP1 TYPEC_SSRXP2 TYPEC_SSTXN1 TYPEC_SSTXN2 TYPEC_SSTXP1 TYPEC_SSTXP2
net class 17.HDMI_TX1: HDMI1_eARC+ HDMI1_eARC- HDMI_TX1_D0N HDMI_TX1_D0N_PORT HDMI_TX1_D0P HDMI_TX1_D0P_PORT HDMI_TX1_D1N HDMI_TX1_D1N_PORT HDMI_TX1_D1P HDMI_TX1_D1P_PORT HDMI_TX1_D2N HDMI_TX1_D2N_PORT HDMI_TX1_D2P HDMI_TX1_D2P_PORT HDMI_TX1_D3N HDMI_TX1_D3N_PORT HDMI_TX1_D3P HDMI_TX1_D3P_PORT HDMI_TX1_SBDN HDMI_TX1_SBDP
net class 16.HDMI_TX0: HDMI0_eARC+ HDMI0_eARC- HDMI_TX0_D0N HDMI_TX0_D0N_PORT HDMI_TX0_D0P HDMI_TX0_D0P_PORT HDMI_TX0_D1N HDMI_TX0_D1N_PORT HDMI_TX0_D1P HDMI_TX0_D1P_PORT HDMI_TX0_D2N HDMI_TX0_D2N_PORT HDMI_TX0_D2P HDMI_TX0_D2P_PORT HDMI_TX0_D3N HDMI_TX0_D3N_PORT HDMI_TX0_D3P HDMI_TX0_D3P_PORT HDMI_TX0_SBDN HDMI_TX0_SBDP
net class 12.MIPI_DPHY0_RX: MIPI_DPHY0_RX_CLKN MIPI_DPHY0_RX_CLKP MIPI_DPHY0_RX_D0N MIPI_DPHY0_RX_D0P MIPI_DPHY0_RX_D1N MIPI_DPHY0_RX_D1P MIPI_DPHY0_RX_D2N MIPI_DPHY0_RX_D2P MIPI_DPHY0_RX_D3N MIPI_DPHY0_RX_D3P
net class 10.MIPI_DPHY0_TX: MIPI_DPHY0_TX_CLKN MIPI_DPHY0_TX_CLKP MIPI_DPHY0_TX_D0N MIPI_DPHY0_TX_D0P MIPI_DPHY0_TX_D1N MIPI_DPHY0_TX_D1P MIPI_DPHY0_TX_D2N MIPI_DPHY0_TX_D2P MIPI_DPHY0_TX_D3N MIPI_DPHY0_TX_D3P
net class 09.SDMMC: SDMMC_CLK SDMMC_CLK_R SDMMC_CMD SDMMC_CMD_R SDMMC_D0 SDMMC_D0_R SDMMC_D1 SDMMC_D1_R SDMMC_D2 SDMMC_D2_R SDMMC_D3 SDMMC_D3_R
component class "10.MINI PCIE接口": C315
component class 4.以太网_eth1: C50 C51 C52 C53 C54 C55 C56 C57 C58 C59 C60 C61 C62 C63 C64 C65 C66 C67 C68 C69 C70 C71 D7 J7 L7 R48 R49 R50 R51 R52 R53 R54 R55 R56 R57 R58 R59 R60 R61 R62 R63 R64 R66 R67 R68 R69 R70 R71 R72 R73 R74 R75 R76 R373 R374 R375 R376 R377 R378 R379 R380 R381 R382 R383 R386 R387 U3 Y2
component class 12.SATA接口: C280 C281 C282 C283 C290 C291 C292 C293 C294 C295 C296 C297 C298 D85 D86 D87 D88 J38 J39 L26 Q5 Q32 R316 R317 R318 R319 R320 R321 R322 U43
component class "11.MIPI DSI_CSI": C29 C30 C256 C257 C259 C260 C261 C262 J1 J14 R37 R301 R303 R306 R308 R309 U39 U40
component class 10.PCIE2: C127 C128 C129 C130 C249 C250 C251 C252 J13 L25 R138 R139 R140 R141 R142 R143 R144 R145 R146 R147 R148 U17
component class 9.PCIE3: C156 C157 C158 C159 C160 C161 C162 C163 C164 C165 C166 C167 C168 C169 C170 C171 C172 C173 C174 C175 C176 C177 C178 C179 C180 C181 C182 C183 C184 C185 C186 C187 C188 C189 C190 C191 C192 C193 C194 C195 C196 C197 C198 J19 J20 L16 L17 Q30 Q31 R137 R216 R217 R218 R219 R220 R221 R222 R223 R224 R225 R226 R227 R228 R229 R230 R231 R232 R233 R234 R235 R236 R237 R238 R239 R240 R241 R242 R243 R244 R245 R246 R247 R248 R249 R250 R251 R252 R255 R256 R257 R328 U25 U26 U27 U28 Y4
component class 8.HDMI2: C143 C144 C145 C146 C147 C148 C149 C150 C151 C152 C153 C154 D33 D34 D35 D36 D37 D38 D39 D49 D66 D67 D68 D69 D70 D71 D72 D73 J17 Q15 Q16 Q17 Q18 Q19 Q20 Q21 Q22 Q23 R172 R173 R174 R175 R176 R177 R178 R179 R180 R181 R182 R183 R184 R185 R186 R187 R188 R189 R190 R191 R192 R354
component class 7.HDMI2: C131 C132 C133 C134 C135 C136 C137 C138 C139 C140 C141 C142 D5 D14 D26 D27 D28 D29 D30 D31 D32 D50 D51 D52 D53 D54 D65 J16 Q6 Q7 Q8 Q9 Q10 Q11 Q12 Q13 Q14 R151 R152 R153 R154 R155 R156 R157 R158 R159 R160 R161 R162 R163 R164 R165 R166 R167 R168 R169 R170 R171
component class 6.音频_FAN_ADC_LED: C106 C107 C108 C109 C110 C111 C112 C113 C114 C115 C116 C117 C118 C119 C120 C121 C122 C123 C124 C125 C126 C210 C211 C218 C219 C278 C279 C287 C288 C289 C299 C300 C301 C302 C303 C304 C305 C306 C307 C308 C309 C310 C311 C312 D15 D47 D48 D78 D79 D80 D81 D82 D83 J11 J12 J42 J43 L4 L5 L14 L15 L19 L27 L28 L29 LED2 P1 Q1 Q2 Q3 Q4 Q35 R112 R113 R114 R115 R116 R117 R118 R119 R120 R121 R122 R123 R124 R125 R126 R127 R128 R129 R130 R131 R132 R133 R134 R135 R136 R210 R211 R212 R213 R325 R326 R327 R334 R335 R341 R342 R343 R344 R345 R346 R347 R348 R349 R350 R351 R352 SPK1 SW5 U16 U42 U46
component class 5.USB3: C72 C73 C74 C75 C76 C77 C78 C79 C80 C81 C82 C83 C84 C85 C86 C87 C88 C89 C90 C91 C253 C284 C285 C286 D8 D9 D10 D11 D12 D13 J8 J9 L11 L12 R33 R34 R77 R78 R79 R80 R81 R82 R83 R84 R85 R86 R87 R88 R89 R90 R91 R92 R93 R94 R95 R96 R97 R98 R99 R149 R150 R323 R324 U5 U6 U7 U8 U9 U10 U11 U48
component class 13.GPIO扩展接口: C31 C32 H1 H2 H3 R35 R38 R39 R40 R43 R110 R111 R193 R194 R195 R196 R197 R198 R199 U4
component class 3.DEBUG_SD卡_RTC_按键: C4 C5 C9 C10 C15 C28 C35 C36 C235 C236 C237 C238 C240 C241 CR1 D2 D3 D4 D6 D16 D17 D18 D19 D20 D21 D22 D23 D24 D25 D57 D59 J24 R1 R2 R3 R5 R19 R275 R276 R277 R278 R279 R280 R281 R282 R283 R284 R285 R290 R291 SW1 SW2 SW3 SW4 U18 U33 U34 U35 USBC1 Y5
component class 2.电源: C1 C2 C3 C6 C7 C8 C11 C12 C13 C14 C16 C17 C18 C19 C20 C21 C22 C23 C24 C25 C26 C27 C224 C225 C226 C227 C228 C229 C230 C231 C232 C233 C234 C239 D1 F1 J5 L1 L2 L3 L20 L21 LED1 R4 R6 R7 R8 R9 R10 R11 R12 R13 R14 R15 R16 R17 R18 R36 R65 R271 R272 R273 R274 U1 U2 U31 U32
component class 1.BTB: BTB_1 BTB_2 BTB_3 BTB_4 MR1 MR2 MR3 MR4 MR5 MR6 R20 R21 R22 R23 R24 R25 R26 R27 R28 R29 R30 R31 R32 U23
differential pair "37 01.uart_usb": +UART2_D+ -UART2_D-
differential pair "23b 08.MDI3_PHY1_RJ45": +MDIP3_PHY1_RJ45 -MDIN3_PHY1_RJ45
differential pair "23b 07.MDI2_PHY1_RJ45": +MDIP2_PHY1_RJ45 -MDIN2_PHY1_RJ45
differential pair "23b 06.MDI1_PHY1_RJ45": +MDIP1_PHY1_RJ45 -MDIN1_PHY1_RJ45
differential pair "23b 05.MDI0_PHY1_RJ45": +MDIP0_PHY1_RJ45 -MDIN0_PHY1_RJ45
differential pair "23b 04.MDI3_PHY1": +MDIP3_PHY1 -MDIN3_PHY1
differential pair "23b 03.MDI2_PHY1": +MDIP2_PHY1 -MDIN2_PHY1
differential pair "23b 02.MDI1_PHY1": +MDIP1_PHY1 -MDIN1_PHY1
differential pair "23b 01.MDI0_PHY1": +MDIP0_PHY1 -MDIN0_PHY1
differential pair "32b 04.PCIEx4_REF_CLK_R": +PCIEx4_REF_CLKP_R -PCIEx4_REF_CLKN_R
differential pair "32b 03.PCIEx4_REF_CLK": +PCIEx4_REF_CLKP -PCIEx4_REF_CLKN
differential pair "32b 02.PCIE30_PORT1_REF_CLK_R": +PCIE30_PORT1_REF_CLKP_R -PCIE30_PORT1_REF_CLKN_R
differential pair "32b 01.PCIE30_PORT1_REF_CLK": +PCIE30_PORT1_REF_CLKP -PCIE30_PORT1_REF_CLKN
differential pair "32a 06.PCIE30_PORT1_TX1_R": +PCIE30_PORT1_TX1P_R -PCIE30_PORT1_TX1N_R
differential pair "32a 05.PCIE30_PORT1_TX0_R": +PCIE30_PORT1_TX0P_R -PCIE30_PORT1_TX0N_R
differential pair "32a 04.PCIE30_PORT1_RX1": +PCIE30_PORT1_RX1P -PCIE30_PORT1_RX1N
differential pair "32a 03.PCIE30_PORT1_RX0": +PCIE30_PORT1_RX0P -PCIE30_PORT1_RX0N
differential pair "32a 02.PCIE30_PORT1_TX1": +PCIE30_PORT1_TX1P -PCIE30_PORT1_TX1N
differential pair "32a 01.PCIE30_PORT1_TX0": +PCIE30_PORT1_TX0P -PCIE30_PORT1_TX0N
differential pair "31b 04.M2PCIE_REF_CLK_R": +M2PCIE_REF_CLKP_R -M2PCIE_REF_CLKN_R
differential pair "31b 03.M2PCIE_REF_CLK": +M2PCIE_REF_CLKP -M2PCIE_REF_CLKN
differential pair "31b 02.PCIE30_PORT0_REF_CLK_R": +PCIE30_PORT0_REF_CLKP_R -PCIE30_PORT0_REF_CLKN_R
differential pair "31b 01.PCIE30_PORT0_REF_CLK": +PCIE30_PORT0_REF_CLKP -PCIE30_PORT0_REF_CLKN
differential pair "31a 06.PCIE30_PORT0_TX1_R": +PCIE30_PORT0_TX1P_R -PCIE30_PORT0_TX1N_R
differential pair "31a 05.PCIE30_PORT0_TX0_R": +PCIE30_PORT0_TX0P_R -PCIE30_PORT0_TX0N_R
differential pair "31a 04.PCIE30_PORT0_RX1": +PCIE30_PORT0_RX1P -PCIE30_PORT0_RX1N
differential pair "31a 03.PCIE30_PORT0_RX0": +PCIE30_PORT0_RX0P -PCIE30_PORT0_RX0N
differential pair "31a 02.PCIE30_PORT0_TX1": +PCIE30_PORT0_TX1P -PCIE30_PORT0_TX1N
differential pair "31a 01.PCIE30_PORT0_TX0": +PCIE30_PORT0_TX0P -PCIE30_PORT0_TX0N
differential pair "29b 01.PCIE20_1_REFCLK": +PCIE20_1_REFCLKP -PCIE20_1_REFCLKN
differential pair "29a 03.PCIE20_1_TX_R": +PCIE20_1_TXP_R -PCIE20_1_TXN_R
differential pair "29a 02.PCIE20_1_RX": +PCIE20_1_RXP -PCIE20_1_RXN
differential pair "29a 01.PCIE20_1_TX": +PCIE20_1_TXP -PCIE20_1_TXN
differential pair "28a 04.SATA30_0_RX_R": +SATA30_0_RXP_R -SATA30_0_RXN_R
differential pair "28a 03.SATA30_0_TX_R": +SATA30_0_TXP_R -SATA30_0_TXN_R
differential pair "28a 02.PCIE20_0_RX": +PCIE20_0_RXP -PCIE20_0_RXN
differential pair "28a 01.PCIE20_0_TX": +PCIE20_0_TXP -PCIE20_0_TXN
differential pair "22 02.USB20_HOST1_R": +USB20_HOST1_DP_R -USB20_HOST1_DM_R
differential pair "22 01.USB20_HOST1": +USB20_HOST1_DP -USB20_HOST1_DM
differential pair "21 02.USB20": +USB20_DP1 -USB20_DM1
differential pair "21 01.USB20_HOST0": +USB20_HOST0_DP -USB20_HOST0_DM
differential pair "20b 02.USB30": +USB30_DP -USB30_DM
differential pair "20b 01.TYPEC1_USB20_OTG": +TYPEC1_USB20_OTG_DP -TYPEC1_USB20_OTG_DM
differential pair "20a 04.USB30_RX": +USB30_RXP -USB30_RXN
differential pair "20a 03.USB30_TX": +USB30_TXP -USB30_TXN
differential pair "20a 02.TYPEC1_SSRX1": +TYPEC1_SSRX1P -TYPEC1_SSRX1N
differential pair "20a 01.TYPEC1_SSTX1": +TYPEC1_SSTX1P -TYPEC1_SSTX1N
differential pair "19b 02.TYPEC": +TYPEC_DP -TYPEC_DM
differential pair "19b 01.TYPEC0_USB20_OTG": +TYPEC0_USB20_OTG_DP -TYPEC0_USB20_OTG_DM
differential pair "19a 08.TYPEC_SSRX2": +TYPEC_SSRXP2 -TYPEC_SSRXN2
differential pair "19a 07.TYPEC_SSRX1": +TYPEC_SSRXP1 -TYPEC_SSRXN1
differential pair "19a 06.TYPEC_SSTX2": +TYPEC_SSTXP2 -TYPEC_SSTXN2
differential pair "19a 05.TYPEC_SSTX1": +TYPEC_SSTXP1 -TYPEC_SSTXN1
differential pair "19a 04.TYPEC0_SSRX2": +TYPEC0_SSRX2P -TYPEC0_SSRX2N
differential pair "19a 03.TYPEC0_SSRX1": +TYPEC0_SSRX1P -TYPEC0_SSRX1N
differential pair "19a 02.TYPEC0_SSTX2": +TYPEC0_SSTX2P -TYPEC0_SSTX2N
differential pair "19a 01.TYPEC0_SSTX1": +TYPEC0_SSTX1P -TYPEC0_SSTX1N
differential pair "17 10.HDMI1_EARC": +HDMI1_eARC+ -HDMI1_eARC-
differential pair "17 09.HDMI_TX1_D3_PORT": +HDMI_TX1_D3P_PORT -HDMI_TX1_D3N_PORT
differential pair "17 08.HDMI_TX1_D2_PORT": +HDMI_TX1_D2P_PORT -HDMI_TX1_D2N_PORT
differential pair "17 07.HDMI_TX1_D1_PORT": +HDMI_TX1_D1P_PORT -HDMI_TX1_D1N_PORT
differential pair "17 06.HDMI_TX1_D0_PORT": +HDMI_TX1_D0P_PORT -HDMI_TX1_D0N_PORT
differential pair "17 05.HDMI_TX1_SBD": +HDMI_TX1_SBDP -HDMI_TX1_SBDN
differential pair "17 04.HDMI_TX1_D3": +HDMI_TX1_D3P -HDMI_TX1_D3N
differential pair "17 03.HDMI_TX1_D2": +HDMI_TX1_D2P -HDMI_TX1_D2N
differential pair "17 02.HDMI_TX1_D1": +HDMI_TX1_D1P -HDMI_TX1_D1N
differential pair "17 01.HDMI_TX1_D0": +HDMI_TX1_D0P -HDMI_TX1_D0N
differential pair "16 10.HDMI0_EARC": +HDMI0_eARC+ -HDMI0_eARC-
differential pair "16 09.HDMI_TX0_D3_PORT": +HDMI_TX0_D3P_PORT -HDMI_TX0_D3N_PORT
differential pair "16 08.HDMI_TX0_D2_PORT": +HDMI_TX0_D2P_PORT -HDMI_TX0_D2N_PORT
differential pair "16 07.HDMI_TX0_D1_PORT": +HDMI_TX0_D1P_PORT -HDMI_TX0_D1N_PORT
differential pair "16 06.HDMI_TX0_D0_PORT": +HDMI_TX0_D0P_PORT -HDMI_TX0_D0N_PORT
differential pair "16 05.HDMI_TX0_SBD": +HDMI_TX0_SBDP -HDMI_TX0_SBDN
differential pair "16 04.HDMI_TX0_D3": +HDMI_TX0_D3P -HDMI_TX0_D3N
differential pair "16 03.HDMI_TX0_D2": +HDMI_TX0_D2P -HDMI_TX0_D2N
differential pair "16 02.HDMI_TX0_D1": +HDMI_TX0_D1P -HDMI_TX0_D1N
differential pair "16 01.HDMI_TX0_D0": +HDMI_TX0_D0P -HDMI_TX0_D0N
differential pair "12 05.MIPI_DPHY0_RX_D3": +MIPI_DPHY0_RX_D3P -MIPI_DPHY0_RX_D3N
differential pair "12 04.MIPI_DPHY0_RX_D2": +MIPI_DPHY0_RX_D2P -MIPI_DPHY0_RX_D2N
differential pair "12 03.MIPI_DPHY0_RX_D1": +MIPI_DPHY0_RX_D1P -MIPI_DPHY0_RX_D1N
differential pair "12 02.MIPI_DPHY0_RX_D0": +MIPI_DPHY0_RX_D0P -MIPI_DPHY0_RX_D0N
differential pair "12 01.MIPI_DPHY0_RX_CLK": +MIPI_DPHY0_RX_CLKP -MIPI_DPHY0_RX_CLKN
differential pair "10 05.MIPI_DPHY0_TX_D3": +MIPI_DPHY0_TX_D3P -MIPI_DPHY0_TX_D3N
differential pair "10 04.MIPI_DPHY0_TX_D2": +MIPI_DPHY0_TX_D2P -MIPI_DPHY0_TX_D2N
differential pair "10 03.MIPI_DPHY0_TX_D1": +MIPI_DPHY0_TX_D1P -MIPI_DPHY0_TX_D1N
differential pair "10 02.MIPI_DPHY0_TX_D0": +MIPI_DPHY0_TX_D0P -MIPI_DPHY0_TX_D0N
differential pair "10 01.MIPI_DPHY0_TX_CLK": +MIPI_DPHY0_TX_CLKP -MIPI_DPHY0_TX_CLKN

## Components (designator, comment, footprint, x,y, rotation, side; value= is the part's Value field where it differs from the comment)
BTB_1 "Component_1" F_100PIN 641.77,116.91 r270 top locked
BTB_2 "Component_1" F_100PIN 641.77,2555.91 r270 top locked
BTB_3 "Component_1" F_100PIN 1778.77,111.91 r270 top locked
BTB_4 "Component_1" F_100PIN 1778.77,2550.91 r270 top locked
C1 "10uF" C0603 -337,2940 r270 bottom
C2 "10uF" C0603 -285.53,2940.4 r270 bottom
C3 "0.1uF" C0402 -240.3,2920.72 r270 bottom
C4 "NC" C0402 2825.4,1653.1 r270 bottom
C5 "NC" C0402 2752.3,1908.8 r180 bottom
C6 "0.1uF" C0402 -357,3394.59 r270 bottom
C7 "NC" C0402 -226.58,3423.22 r0 bottom
C8 "22uF" C0805#1 -206.56,3239.25 r90 bottom
C9 "10uF" C0402 2438.91,2439.72 r180 bottom
C10 "0.1uF" C0402 2439.01,2406.22 r180 bottom
C11 "0.1uF" C0402 -252.1,3236.3 r90 bottom
C12 "22uF" C0805#1 -234.9,3350.3 r90 top
C13 "0.1uF" C0402 -234.9,3340.45 r90 bottom
C14 "0.1uF" C0402 -519.55,3638.08 r180 bottom
C15 "0.1uF" C0402 2752,1942.4 r180 bottom
C16 "0.22uF" C0402 -127.79,2399.09 r0 bottom
C17 "10uF" C0603 156.19,2571.53 r90 bottom
C18 "10uF" C0603 91.85,2561.7 r90 bottom
C19 "0.1uF" C0402 105.31,2485.39 r0 bottom
C20 "NC" C0402 92.6,2690.3 r270 top
C21 "47uF" C0805#1 -264.97,2559.2 r0 bottom
C22 "47uF" C0805#1 -265.27,2493.7 r0 bottom
C23 "22uF" C0603 -265.4,2620 r0 bottom
C24 "0.1uF" C0402 -284.72,2663.2 r0 bottom
C25 "1uF" C0402 -33.8,2410.86 r270 top
C26 "0.1uF" C0402 73.11,2424.67 r270 bottom
C27 "0.1uF" C0402 74.4,2666.6 r90 bottom
C28 "0.1uF" C0402 2751.8,2113.03 r180 bottom
C29 "10uF" C0402 469.6,3394.7 r0 bottom
C30 "0.1uF" C0402 469.7,3428 r0 bottom
C31 "10uF" C0402 2154.2,1237.3 r270 bottom
C32 "0.1uF" C0402 2120.65,1242.26 r270 bottom
C35 "100nf" C0603_L 2413.46,2194.5 r0 bottom
C36 "10uf" C0603_L 2413.36,2248.32 r0 bottom
C50 "0.1uF" C0402 356.76,515.78 r0 top
C51 "0.1uF" C0402 356.76,515.78 r0 bottom
C52 "0.1uF" C0402 402.66,567.08 r180 bottom
C53 "4.7uF" C0402 402.66,600.98 r180 bottom
C54 "18pF" C0402 88.71,651.86 r90 bottom
C55 "18pF" C0402 179.26,671.56 r270 bottom
C56 "0.1uF" C0402 -195.9,490.9 r90 bottom
C57 "1nF" C0805#2 -436.3,230.3 r180 bottom
C58 "0.1uF" C0402 73.86,293.6 r270 top
C59 "0.1uF" C0402 317.5,678 r90 top
C60 "0.1uF" C0402 302.8,346.92 r270 bottom
C61 "0.1uF" C0402 268.7,346.9 r270 bottom
C62 "0.1uF" C0402 113.74,381.54 r0 bottom
C63 "0.1uF" C0402 112.7,492.1 r0 bottom
C64 "0.1uF" C0402 164.8,497.9 r270 bottom
C65 "0.1uF" C0402 113.74,413.04 r0 bottom
C66 "0.1uF" C0402 0.5,512 r180 bottom
C67 "0.1uF" C0402 0.6,546.3 r180 bottom
C68 "0.1uF" C0402 -0.92,445.1 r180 bottom
C69 "0.1uF" C0402 266.8,525.2 r90 bottom
C70 "0.1uF" C0402 198.6,449.72 r270 bottom
C71 "0.1uF" C0402 293.3,534.2 r90 bottom
C72 "10uF" C0402 805.96,3043.92 r270 bottom
C73 "0.1uF" C0402 772.06,3043.72 r270 bottom
C74 "0.1uF" C0402 679.08,3126.47 r180 bottom
C75 "0.1uF" C0402 1439.05,2951.95 r270 bottom
C76 "0.1uF" C0402 1473.43,2951.95 r270 bottom
C77 "220pF" C0402 679.08,3091.5 r180 bottom
C78 "220pF" C0402 863.06,3146.58 r90 bottom
C79 "0.1uF" C0402 808.4,3278.6 r270 top
C80 "0.1uF" C0402 775.1,3278.6 r270 top
C81 "1uF" C0402 679.08,3161.43 r180 bottom
C82 "0.1uF" C0402 598.4,3278.7 r270 top
C83 "0.1uF" C0402 564.3,3278.6 r270 top
C84 "0.1uF" C0402 669.7,3278.6 r270 bottom
C85 "0.1uF" C0402 775.6,3278.42 r270 bottom
C86 "0.1uF" C0402 528.12,3279.08 r90 bottom
C87 "10uF" C0402 590.5,3022.2 r180 bottom
C88 "0.1uF" C0402 590.5,3055.38 r180 bottom
C89 "0.1uF" C0402 1203.4,3464.43 r270 bottom
C90 "10uF" C0402 1283.1,3688.13 r180 bottom
C91 "0.1uF" C0402 1283.5,3654.23 r180 bottom
C106 "0.1uF" C0402 2329.41,811.63 r90 top
C107 "4.7uF" C0402 2294.41,811.63 r90 top
C108 "0.1uF" C0402 2312.31,516.37 r270 top
C109 "0.1uF" C0402 2364.41,811.63 r90 top
C110 "4.7uF" C0402 2399.41,811.63 r90 top
C111 "10uF" C0402 2960.21,648.04 r270 top
C112 "1uF" C0402 2169.63,656.21 r180 top
C113 "1uF" C0402 2169.63,691.98 r180 top
C114 "0.1uF" C0402 2278.21,516.77 r270 top
C115 "1uF" C0402 2169.63,727.75 r180 top
C116 "270pF" C0402 2954.11,572.82 r270 top
C117 "1uF" C0402 2189.41,811.63 r90 top
C118 "10uF" C0402 2224.41,811.63 r90 top
C119 "10uF" C0402 2259.41,811.63 r90 top
C120 "10uF" C0402 2427.11,619.97 r270 top
C121 "NC" C0402 2920.81,572.4 r90 top
C122 "47uF" C0603 2788.81,737.12 r270 top
C123 "10uF" C0402 2345.81,516.55 r270 top
C124 "10uF" C0402 2330.11,810.95 r270 bottom
C125 "4.7uF" C0402 2614.87,468.65 r90 bottom
C126 "100pF" C0402 2479.61,523.2 r90 bottom
C127 "0.1uF" C0402 472.01,827.49 r90 bottom
C128 "NC" C0402 396.5,826.78 r90 bottom
C129 "22uF" C0603 253.17,984.2 r270 top
C130 "0.1uF" C0402 260.77,1079.8 r90 top
C131 "0.22uF" C0402 2572.7,3276.81 r0 top
C132 "0.22uF" C0402 2572.7,3242.4 r0 top
C133 "0.22uF" C0402 2572.7,3207.99 r0 top
C134 "0.22uF" C0402 2572.7,3173.57 r0 top
C135 "0.22uF" C0402 2572.7,3139.16 r0 top
C136 "0.22uF" C0402 2572.7,3104.75 r0 top
C137 "0.22uF" C0402 2572.7,3070.34 r0 top
C138 "0.22uF" C0402 2572.7,3035.92 r0 top
C139 "1uF" C0402 2572.7,3001.51 r0 top
C140 "1uF" C0402 2572.6,2967.51 r0 top
C141 "1uF" C0402 2855.3,2861.51 r270 bottom
C142 "100pF" C0402 2870.8,3570.21 r270 bottom
C143 "0.22uF" C0402 1906.38,3277.05 r0 top
C144 "0.22uF" C0402 1906.38,3242.64 r0 top
C145 "0.22uF" C0402 1906.38,3208.23 r0 top
C146 "0.22uF" C0402 1906.38,3173.82 r0 top
C147 "0.22uF" C0402 1906.38,3139.4 r0 top
C148 "0.22uF" C0402 1906.38,3104.99 r0 top
C149 "0.22uF" C0402 1906.38,3070.58 r0 top
C150 "0.22uF" C0402 1906.38,3036.16 r0 top
C151 "1uF" C0402 1906.38,3001.75 r0 top
C152 "1uF" C0402 1906.28,2967.75 r0 top
C153 "1uF" C0402 2141.9,2860.61 r270 bottom
C154 "100pF" C0402 2119,3567.14 r270 bottom
C156 "0.1uF" C0402 187.6,826.84 r90 bottom
C157 "NC" C0402 53.42,785.8 r180 top
C158 "22uF" C0603 -26,984.3 r270 top
C159 "0.1uF" C0402 -15.9,1079.8 r90 top
C160 "22uF" C0603 63.5,864.5 r270 top
C161 "0.1uF" C0402 16.1,883.5 r270 top
C162 "1uF" C0402 226.68,2054.53 r180 top
C163 "0.1uF" C0402 226.68,2054.53 r180 bottom
C164 "18pF" C0402 373.83,2180.06 r180 bottom
C165 "18pF" C0402 354.13,2270.61 r0 bottom
C166 "0.1uF" C0402 68.38,2185.57 r0 bottom
C167 "1uF" C0402 68.38,2149.63 r0 bottom
C168 "4.7uF" C0402 68.38,2257.43 r180 bottom
C169 "0.1uF" C0402 36.1,1918.2 r0 bottom
C170 "0.1uF" C0402 36.1,1883.7 r0 bottom
C171 "0.1uF" C0402 36.1,1730.7 r0 bottom
C172 "0.1uF" C0402 36.1,1797.7 r0 bottom
C173 "0.1uF" C0402 36.1,1697.2 r0 bottom
C174 "0.1uF" C0402 36.1,1764.2 r0 bottom
C175 "0.22uF" C0402 -448.18,1600 r0 bottom
C176 "0.22uF" C0402 -448.18,1562.2 r0 bottom
C177 "0.22uF" C0402 -448.18,1470.1 r0 bottom
C178 "0.22uF" C0402 -448.18,1432.7 r0 bottom
C179 "0.1uF" C0402 -202.98,2134.54 r90 bottom
C180 "22uF" C0603 -411.48,2296.2 r270 top
C181 "0.1uF" C0402 36,1662.8 r0 bottom
C182 "0.1uF" C0402 36.22,1628.3 r0 bottom
C183 "0.1uF" C0402 36.32,1593.8 r0 bottom
C184 "4.7uF" C0402 386.98,2072.72 r180 bottom
C185 "0.1uF" C0402 386.98,2039.01 r180 bottom
C186 "4.7uF" C0402 312.26,2072.88 r0 bottom
C187 "0.1uF" C0402 312.26,2038.03 r0 bottom
C188 "NC" C0402 312.26,2107.73 r0 bottom
C189 "0.22uF" C0402 -445.5,2021.5 r180 bottom
C190 "0.22uF" C0402 -446.4,1988 r180 bottom
C191 "0.22uF" C0402 -444.72,1888.1 r180 bottom
C192 "0.22uF" C0402 -444.3,1853.5 r180 bottom
C193 "0.1uF" C0402 -402.48,2394 r90 top
C194 "NC" C0402 -335.46,2095.1 r180 bottom
C195 "22uF" C0603 -326.58,2173.1 r270 top
C196 "0.1uF" C0402 -369.98,2190.6 r270 top
C197 "22uF" C0603 -437.85,2631.85 r270 bottom
C198 "0.1uF" C0402 -396.05,2633.87 r270 bottom
C210 "47uF" C1206 2676.7,23.85 r0 top
C211 "47uF" C1206 2676.7,118.35 r0 top
C218 "47uF" C1206 2676.7,213.45 r0 top
C219 "22uF" C0805#2 2706.11,-67.95 r0 top
C224 "0.1uF" C0402 -513.93,3421.2 r180 bottom
C225 "NC" C0402 -482.19,3290.42 r270 top
C226 "22uF" C0805#1 -712.22,3286.9 r180 bottom
C227 "0.1uF" C0402 -694.77,3337.2 r180 bottom
C228 "22uF" C0805#1 -556.36,3293.8 r0 top
C229 "0.1uF" C0402 -566.21,3293.8 r0 bottom
C230 "22uF" C0805#1 -659.51,3497.48 r0 bottom
C231 "0.1uF" C0402 -668.83,3542.78 r0 bottom
C232 "NC" C0402 -485.21,3504.71 r270 bottom
C233 "22uF" C0805#1 -556.68,3510.18 r0 top
C234 "0.1uF" C0402 -566.53,3510.18 r0 bottom
C235 "0.1uF" C0402 2585.16,2336.12 r270 bottom
C236 "0.1uF" C0402 2648.36,2515.72 r90 bottom
C237 "0.1uF" C0402 2337.7,1619 r270 top
C238 "10uF" C0402 2336.1,1536.6 r90 top
C239 "0.1uF" C0402 -459.21,3582.7 r270 top
C240 "18pF" C0402 2334.1,1346.6 r0 top
C241 "18pF" C0402 2413.5,1347.2 r180 top
C249 "22uF" C0603 352.27,866.4 r270 top
C250 "0.1uF" C0402 307.67,886.1 r270 top
C251 "0.1uF" C0402 545.29,713.45 r0 bottom
C252 "0.1uF" C0402 545.29,679.25 r0 bottom
C253 "0.1uF" C0402 1913.6,2370.6 r270 top
C256 "10uF" C0402 -222.6,3478.6 r180 bottom
C257 "0.1uF" C0402 -223,3512.4 r180 bottom
C259 "0.1uF" C0402 -262.1,3701 r0 bottom
C260 "10uF" C0402 -341.28,3509.3 r180 bottom
C261 "0.1uF" C0402 -341.3,3475 r180 bottom
C262 "0.1uF" C0402 -368.62,3705.2 r0 bottom
C278 "0.1uF" C0402 2713.01,303.63 r90 top
C279 "0.1uF" C0402 2610.71,-73.85 r270 top
C280 "22uF" C0805#2 -167.32,943.2 r0 bottom
C281 "22uF" C0805#2 -166.82,1026.2 r0 bottom
C282 "0.1uF" C0402 -248.22,951.5 r90 bottom
C283 "0.1uF" C0402 -116.52,719.17 r90 bottom
C284 "0.1uF" C0402 1460.4,3456.33 r0 bottom
C285 "10uF" C0402 1462.6,3654.03 r180 bottom
C286 "0.1uF" C0402 1463.1,3687.43 r180 bottom
C287 "47uF" C0603 2564.81,767.12 r270 top
C288 "0.1uF" C0402 2894.11,824.32 r270 top
C289 "0.1uF" C0402 2774.91,660.82 r180 top
C290 "NC" C0402 -255.82,615.47 r180 top
C291 "22uF" C0603 -269.02,800.17 r270 bottom
C292 "0.1uF" C0402 -276.62,683.69 r270 top
C293 "22uF" C0603 -194.62,666.37 r270 bottom
C294 "0.1uF" C0402 -238.62,684.67 r270 top
C295 "10nF" C0402 -653.44,756.5 r180 bottom
C296 "10nF" C0402 -653.44,801.6 r180 bottom
C297 "10nF" C0402 -653.44,916.2 r180 bottom
C298 "10nF" C0402 -653.44,961.4 r180 bottom
C299 "0.1uF" C0402 2396.73,-99.35 r0 top
C300 "1nF" C0402 2436.21,281.15 r180 top
C301 "1nF" C0402 2436.91,246.45 r180 top
C302 "1uF" C0402 2349.4,96.4 r90 top
C303 "47uF" C1206 2472.52,124.15 r180 bottom
C304 "47uF" C1206 2473.72,29.15 r180 bottom
C305 "47uF" C1206 2472.91,221.85 r180 bottom
C306 "22uF" C0805#2 2439.51,-68.45 r180 bottom
C307 "0.1uF" C0402 2435.81,312.45 r90 bottom
C308 "0.1uF" C0402 2534.11,-63.97 r270 bottom
C309 "0.1uF" C0402 2746.79,-93.85 r180 bottom
C310 "1nF" C0402 2733.39,283.15 r0 bottom
C311 "1nF" C0402 2732.49,244.75 r0 bottom
C312 "1uF" C0402 2806.5,92.8 r0 top
CR1 "1220" CR1220_A 2507.5,1552 r270 bottom
D1 "SMAJ13CA" SMA_CA -495.5,3027.7 r0 bottom
D2 "D2315-3R3" esd0402 2752.32,1802.5 r0 bottom
D3 "D2315-3R3" esd0402 2752.3,1872.7 r0 bottom
D4 "D2315-3R3" esd0402 2752.2,2010.9 r0 bottom
D5 "D1250-5R5C" esd0402 2876.58,3148.91 r180 bottom
D6 "D2315-3R3" esd0402 2751.9,2045.1 r0 bottom
D7 "RB521S-30" SOD523 73.86,288.84 r90 bottom
D8 "D2315-5R0B" esd0402 739.97,3278.6 r90 bottom
D9 "D2315-5R0B" esd0402 705.6,3278.8 r90 bottom
D10 "D2315-5R0B" esd0402 773.1,3366.32 r90 bottom
D11 "D2315-5R0B" esd0402 698.7,3610.8 r270 bottom
D12 "D2315-5R0B" esd0402 630.6,3611.78 r270 bottom
D13 "D2315-5R0B" esd0402 772.1,3517.98 r270 bottom
D14 "D1250-5R5C" esd0402 2876.58,3181.79 r180 bottom
D15 "1N4148W" SOD-123 -39.3,2806 r180 bottom
D16 "D2315-5R0B" esd0402 2275.08,2075.02 r0 bottom
D17 "D2315-5R0B" esd0402 2275.08,2118.32 r0 bottom
D18 "D2315-5R0B" esd0402 2275.08,2164.32 r0 bottom
D19 "D2315-5R0B" esd0402 2275.08,2248.92 r0 bottom
D20 "D2315-5R0B" esd0402 2275.08,2334.42 r0 bottom
D21 "D2315-5R0B" esd0402 2275.16,2381.32 r0 bottom
D22 "D2315-5R0B" esd0402 2354.73,2422.5 r180 bottom
D23 "D2315-3R3" esd0402 2275.38,2293.02 r180 top
D24 "D2315-5R0B" esd0402 2670.46,2426.52 r270 bottom
D25 "D2315-5R0B" esd0402 2705.96,2426.24 r270 bottom
D26 "1N5819W" SOD-123 2972.1,2823.51 r270 bottom
D27 "D1250-5R5C" esd0402 2785.9,2896.91 r90 bottom
D28 "D1250-5R5C" esd0402 2977.5,2941.51 r180 bottom
D29 "D1250-5R5C" esd0402 2751.7,2896.61 r90 bottom
D30 "D1250-5R5C" esd0402 2977.02,2975.01 r180 bottom
D31 "D1250-5R5C" esd0402 2718.5,2897.33 r90 bottom
D32 "D2315-5R0B" esd0402 2820.7,2861.41 r90 bottom
D33 "1N5819W" SOD-123 2283.7,2899.64 r90 bottom
D34 "D1250-5R5C" esd0402 2103.8,2885.26 r90 bottom
D35 "D1250-5R5C" esd0402 2176.31,3066.34 r90 bottom
D36 "D1250-5R5C" esd0402 2070,2885.61 r90 bottom
D37 "D1250-5R5C" esd0402 2192.9,3145.44 r180 bottom
D38 "D1250-5R5C" esd0402 2035.8,2885.31 r90 bottom
D39 "D2315-5R0B" esd0402 2177.1,2861.02 r90 bottom
D49 "1N5819W" SOD-123 1713.7,3678.04 r180 bottom
D50 "D1250-5R5C" esd0402 2876.58,3214.68 r180 bottom
D51 "D1250-5R5C" esd0402 2876.58,3247.56 r180 bottom
D52 "D1250-5R5C" esd0402 2876.58,3280.44 r180 bottom
D53 "D1250-5R5C" esd0402 2876.58,3313.33 r180 bottom
D54 "D1250-5R5C" esd0402 2876.58,3346.21 r180 bottom
D57 "BAT54C" SOT23 2360.4,1728.7 r180 top
D59 "D2315-3R3" esd0402 2298.7,1536.9 r90 top
D65 "D1250-5R5C" esd0402 2847.58,3413.51 r180 bottom
D66 "D1250-5R5C" esd0402 2192.98,3179.24 r180 bottom
D67 "D1250-5R5C" esd0402 2193.08,3213.18 r180 bottom
D68 "D1250-5R5C" esd0402 2193.08,3246.06 r180 bottom
D69 "D1250-5R5C" esd0402 2193.08,3278.94 r180 bottom
D70 "D1250-5R5C" esd0402 2193.08,3311.83 r180 bottom
D71 "D1250-5R5C" esd0402 2193.08,3344.71 r180 bottom
D72 "D1250-5R5C" esd0402 2164.7,3417.64 r180 bottom
D73 "D1250-5R5C" esd0402 2164.18,3451.94 r180 bottom
D78 "D2315-5R0B" esd0402 2445.58,400.08 r90 bottom
D79 "D2315-5R0B" esd0402 2626.91,821.6 r90 top
D80 "D2315-5R0B" esd0402 2687.71,554.02 r0 top
D81 "D2315-5R0B" esd0402 2824.41,824.32 r90 top
D82 "D2315-5R0B" esd0402 2854.41,648.3 r270 top
D83 "D2315-5R0B" esd0402 2487.61,400.55 r90 bottom
D85 "D2315-5R0B" esd0402 -797.22,959.8 r0 bottom
D86 "D2315-5R0B" esd0402 -797.22,914.8 r0 bottom
D87 "D2315-5R0B" esd0402 -797.22,799.1 r0 bottom
D88 "D2315-5R0B" esd0402 -797.22,758.9 r0 bottom
F1 "SMD1812P200TF16" F1812 -287.7,2893.9 r90 top
H1 "HX PZ2.0-2x4P WT" HDR-SMD_HX-PZ2.0-2X4P-WT 2623.19,1828.41 r90 top
H2 "HX PZ2.0-2x4P WT" HDR-SMD_HX-PZ2.0-2X4P-WT 2623.31,1342.11 r90 top
H3 "HX PZ2.0-2x4P WT" HDR-SMD_HX-PZ2.0-2X4P-WT 2623.51,1026.87 r90 top
J1 "FPC_0P5_24P_D" fpc_24p_0p5 177.2,3596 r180 bottom
J5 "DC-044A-20A" dc_in_th_3p_10r1x11r6 -615.9,2986 r0 top
J7 "HY911130A" HY911130A -504.54,211.53 r90 top
J8 "TYPE-C" usb-c-smd_tyc-324g 734.8,3597.9 r180 top
J9 "USB3D0_USB2D0-A-D" USB3D0-AF-18P 1314.22,3464.08 r180 top
J11 "PJ-393" audio_smd_7p_6r0x8r8 2755.79,718.92 r270 bottom
J12 "A1501WV-2P" zh1p5mm_th_2p -40,2854.4 r0 top
J13 "M2_NGFF_E_KEY" M2_NGFF_E_KEY 769.12,680.73 r90 bottom locked
J14 "FPC_0R5_30P_D" FPC-30P-0P5 105.3,3597.1 r180 top
J16 "HDMI-001C" HDMI-SMD 2797.45,3345.41 r90 top
J17 "HDMI-001C" HDMI-SMD 2113.95,3343.91 r90 top
J19 "M2_NGFF_M_KEY" M2_NGFF_M_KEY -203.38,1554.5 r270 bottom locked
J20 "AAA-PCI-161-K03" PCIE_64PIN_1R00 -673.69,1978.76 r270 top
J24 "TF_Card" TFCARD 2561.56,2333.92 r90 top
J38 "XH-4A" XH2p54-4p -455.6,827.5 r270 top
J39 "SATA" ssata_v -728.39,859.4 r90 top
J42 "PH-2A" PH-1x2-2P0_l 2913.43,170.85 r90 bottom
J43 "PH-2A" PH-1x2-2P0_l 2913.3,407.8 r90 bottom
L1 "100R 100MHz" L0603#1 -607.5,2794.7 r0 bottom
L2 "3.3uH" l4520 -277.33,3209.82 r0 top
L3 "1.5uH" L0518 -198.01,2567.4 r180 top
L4 "NC" L0603#2 2282.4,506.8 r90 bottom
L5 "NC" L0603#2 2366.27,817.96 r270 bottom
L7 "2.2uH" L2520 388.41,585.08 r0 top
L11 "100R 100MHz" L0603#2 1572.92,3316.83 r180 bottom
L12 "100R 100MHz" L0603#2 691.3,3683.3 r180 bottom
L14 "100R 100MHz" L0603#2 2326.51,501.95 r90 bottom
L15 "100R 100MHz" L0603#2 2414.34,817.86 r270 bottom
L16 "3.3uH" l4520 107.03,1017.5 r180 top
L17 "3.3uH" l4520 -279.78,2322.3 r180 top
L19 "1K 100MHz" L0603#2 2550.21,245.85 r90 top
L20 "3.3uH" l4520 -704.49,3352.9 r270 top
L21 "3.3uH" l4520 -704.21,3568.7 r270 top
L25 "3.3uH" l4520 381,1015.8 r180 top
L26 "3.3uH" l4520 -198.92,815.17 r180 top
L27 "1K 100MHz" L0603#2 2501.61,247.15 r90 top
L28 "1K 100MHz" L0603#2 2609.11,269.25 r90 bottom
L29 "1K 100MHz" L0603#2 2658.81,269.25 r90 bottom
LED1 "红色" LED0603_R 1859.7,-94 r270 top
LED2 "红色" LED0603_R 1918.32,-92.6 r90 top
MR1 "MARK1.6" "Mark 1" 2960.1,-92.6 r180 bottom
MR2 "MARK1.6" "Mark 1" 2960.3,-93 r0 top
MR3 "MARK1.6" "Mark 1" 109.3,2965.6 r180 bottom
MR4 "MARK1.6" "Mark 1" 2478.4,2701.2 r180 bottom
MR5 "MARK1.6" "Mark 1" 109.3,2965.4 r0 top
MR6 "MARK1.6" "Mark 1" 2478.2,2701.1 r0 top
P1 "MIC_POM" MIC2-4R00-TM 2470.61,437.55 r180 top
Q1 "SSM3J328R-LF" SOT23 -84.5,3000.6 r0 bottom
Q2 "SS8050" SOT23 -122,3007.6 r0 top
Q3 "WNM2016-3/TR" SOT23 2714.91,817.42 r180 top
Q4 "WNM2016-3/TR" SOT23 2660.01,631.72 r0 top
Q5 "SSM3J328R-LF" SOT23 -240.82,978.2 r270 top
Q6 "2SK3018" SOT23 2618.7,3479.91 r270 bottom
Q7 "2SK3018" SOT23 2915.2,3653.31 r0 bottom
Q8 "2SK3018" SOT23 2793.7,3653.11 r0 bottom
Q9 "2SK3018" SOT23 2673.7,3653.01 r0 bottom
Q10 "2SK3018" SOT23 2459.5,2944.01 r90 bottom
Q11 "2SK3018" SOT23 2459.6,3306.41 r90 bottom
Q12 "2SK3018" SOT23 2460.1,3185.61 r90 bottom
Q13 "2SK3018" SOT23 2459.3,3064.71 r90 bottom
Q14 "2SK3018" SOT23 2508,3570.01 r180 bottom
Q15 "2SK3018" SOT23 1913.9,3471.34 r270 bottom
Q16 "2SK3018" SOT23 2200.6,3648.44 r0 bottom
Q17 "2SK3018" SOT23 2079.8,3647.64 r0 bottom
Q18 "2SK3018" SOT23 1957.7,3647.04 r0 bottom
Q19 "2SK3018" SOT23 1789.9,2968.54 r90 bottom
Q20 "2SK3018" SOT23 1789.9,3322.64 r90 bottom
Q21 "2SK3018" SOT23 1789.9,3204.61 r90 bottom
Q22 "2SK3018" SOT23 1789.9,3086.58 r90 bottom
Q23 "2SK3018" SOT23 1751.51,3565.04 r180 bottom
Q30 "SSM3J328R-LF" SOT23 -402.35,2633.35 r90 top
Q31 "SS8050" SOT23 -392.65,2509.35 r270 top
Q32 "SS8050" SOT23 -254.12,1104.5 r90 top
Q35 "SS8050" SOT23 2006.02,-84.6 r0 top
R1 "100R" R0402 2761.9,1768.9 r180 bottom
R2 "100R" R0402 2752.3,1836.6 r180 bottom
R3 "10K" R0402 2475.6,1403.1 r90 top
R4 "115K" R0402 -226.58,3423.22 r0 top
R5 "100R" R0402 2752.1,1977 r180 bottom
R6 "1K" R0402 -319.6,3394.59 r270 bottom
R7 "20K" R0402 -282.2,3394.59 r270 bottom
R8 "3.3R" R0402 -127.99,2432.09 r180 bottom
R9 "510K" R0402 38.4,2411.24 r90 top
R10 "NC" R0402 -108.6,2719.6 r90 top
R11 "4.7K" R0402 1859.7,-83.68 r90 bottom
R12 "43K" R0402 4.2,2411.24 r90 top
R13 "NC" R0402 128,2690 r90 top
R14 "100K" R0402 -68.6,2411.88 r270 top
R15 "100K" R0402 26.8,2574.8 r90 bottom
R16 "100K" R0402 108.31,2424.09 r270 bottom
R17 "7.5K" R0402 5.01,2424.67 r270 bottom
R18 "NC" R0402 -67.79,2425.31 r90 bottom
R19 "100R" R0402 2751.8,2079.5 r180 bottom
R20 "NC" R0402_L 1493.74,2393.5 r180 top
R21 "NC" R0402_L 1566.7,2394.5 r0 top
R22 "NC" R0402_L 1493,2358.5 r0 top
R23 "NC" R0402_L 1562.6,2358.3 r0 top
R24 "NC" R0402 436.6,-41.2 r270 top
R25 "2.2K" R0402 -342.4,3474 r0 top
R26 "2.2K" R0402 -342.28,3510 r0 top
R27 "2.2K" R0402 2455.6,1181.2 r270 top
R28 "2.2K" R0402 2461.7,1312.9 r270 top
R29 "2.2K" R0402 2232.4,590.8 r0 bottom
R30 "2.2K" R0402 2232.7,625.9 r0 bottom
R31 "2.2K" R0402 2840.82,1357 r0 bottom
R32 "2.2K" R0402 2840.12,1426.7 r0 bottom
R33 "1K" R0402 1271.4,3464.43 r90 bottom
R34 "1K" R0402 1383,3491.33 r180 bottom
R35 "100R" R0402 2840.5,1322 r180 bottom
R36 "115K" R0402 -482.19,3290.42 r270 bottom
R37 "0R" R0402 470.2,3462.1 r180 bottom
R38 "0R" R0402 2240.6,1049.1 r90 bottom
R39 "0R" R0402 2274.2,1049.34 r90 bottom
R40 "100R" R0402 2311.1,1049.4 r90 bottom
R43 "10K" R0402 2197.42,1242.26 r90 bottom
R48 "4.7K" R0402 356.76,418.78 r0 bottom
R49 "4.7K" R0402 356.76,387.28 r0 bottom
R50 "4.7K" R0402 356.76,324.28 r0 bottom
R51 "22R" R0402 356.76,418.78 r180 top
R52 "22R" R0402 356.76,387.28 r180 top
R53 "2.49K" R0402 108.09,550.54 r180 bottom
R54 "22R" R0402 356.76,355.78 r180 top
R55 "22R" R0402 356.76,324.28 r180 top
R56 "22R" R0402 356.82,481.78 r180 top
R57 "22R" R0402 356.76,450.28 r180 top
R58 "4.7K" R0402 356.76,355.78 r180 bottom
R59 "4.7K" R0402 356.82,481.78 r180 bottom
R60 "4.7K" R0402 356.76,450.28 r180 bottom
R61 "4.7K" R0402 141.56,293.6 r90 top
R62 "4.7K" R0402 150.2,294.1 r90 bottom
R63 "4.7K" R0402 259.06,612.48 r270 top
R64 "510R" R0603 -790.7,402.3 r270 bottom
R65 "1K" R0402 -513.93,3383.8 r180 bottom
R66 "510R" R0603 -608.1,39.4 r90 bottom
R67 "100R" R0402 225.06,612.88 r270 top
R68 "120R" R0402 225.06,612.88 r270 bottom
R69 "10K" R0402 107.86,293.6 r90 bottom
R70 "NC" R0402 107.86,293.6 r90 top
R71 "1M" R0805 -435.5,143.5 r0 bottom
R72 "4.7K" R0402 231.46,524.48 r270 bottom
R73 "4.7K" R0402 198.46,524.5 r270 bottom
R74 "4.7K" R0402 259.06,612.48 r90 bottom
R75 "0R" R0402 363.4,290.6 r0 bottom
R76 "0R" R0402 42.3,351.8 r90 bottom
R77 "NC" R0402 1689.57,2370.98 r90 top
R78 "NC" R0402 1723.67,2370.7 r90 top
R79 "2.2R" R0402 1248.7,2950.93 r270 bottom
R80 "2.2R" R0402 1214.2,2950.93 r270 bottom
R81 "2.2R" R0402 739.97,3278.6 r270 top
R82 "2.2R" R0402 704.83,3278.6 r270 top
R83 "0R" R0402 1179.7,2950.93 r270 bottom
R84 "0R" R0402 1145.2,2950.93 r270 bottom
R85 "0R" R0402 845.37,3278.6 r270 top
R86 "0R" R0402 880.5,3278.6 r270 top
R87 "10K" R0402 679.08,3196.4 r0 bottom
R88 "2.2R" R0402 1404.68,2951.95 r270 bottom
R89 "0R" R0402 634.57,3278.6 r270 top
R90 "2.2R" R0402 1370.3,2951.95 r270 bottom
R91 "0R" R0402 668.5,3278.6 r270 top
R92 "100K" R0402 634.57,3278.6 r270 bottom
R93 "1K" R0402 564.3,3278.6 r270 bottom
R94 "100K" R0402 809.9,3278.1 r270 bottom
R95 "3.4K" R0402 534,3036.62 r270 bottom
R96 "NC" R0402 1237.43,3464.43 r90 bottom
R97 "NC" R0402 664.8,3611.3 r90 bottom
R98 "NC" R0402 775.2,3645 r90 bottom
R99 "3.4K" R0402 1305.3,3464.23 r270 bottom
R110 "100R" R0402 2840.7,1391.7 r180 bottom
R111 "100R" R0402 2489,1181.6 r270 top
R112 "4.7R" R0402 2294.91,810.55 r90 bottom
R113 "100R" R0402 2924.31,647.72 r270 top
R114 "0R" R0402 2988.21,572.52 r270 top
R115 "2.2K" R0402 2889.01,647.72 r270 top
R116 "100K" R0402 2888.01,572.42 r270 top
R117 "0R" R0402 2997.21,650.32 r90 top
R118 "100K" R0402 2854.71,572.7 r90 top
R119 "100K" R0402 2860.91,824.32 r90 top
R120 "0R" R0402 2926.01,824.32 r270 top
R121 "10K" R0402 2169.63,620.45 r0 top
R122 "0R" R0402 2746.11,717.12 r270 top
R123 "470R" R0402 2711.81,717.32 r270 top
R124 "0R" R0402 2557.03,688.42 r180 top
R125 "100R" R0402 2580.47,468.59 r270 bottom
R126 "1.1K" R0402 2544.35,476.22 r90 bottom
R127 "0R" R0805 16.6,3002.2 r270 bottom
R128 "4.7K" R0402 1919.12,-100.3 r270 bottom
R129 "0R" R0805 -163.9,2852.2 r90 bottom
R130 "0R" R0402 2360.51,397.25 r180 bottom
R131 "NC" R0805 -36.3,3002.1 r270 top
R132 "10K" R0402 -86,3092.3 r180 top
R133 "1K" R0402 -157.8,2992.8 r270 bottom
R134 "0R" R0402 2360.31,432.35 r180 bottom
R135 "10K" R0402 -191.8,2992.6 r90 bottom
R136 "1.1K" R0402 2403.05,497.32 r270 bottom